# Altium PCB STM32F407VET6_4Layer_PCB.PcbDoc (part 1 of 3)
Units mm, origin at the board's own origin, x right, y up, seen from the top; angles counter-clockwise.
Board outline 86 x 80 mm, 4 copper layers (L1, L2, L3, L4), stack 0.999 mm thick; 172 components, 128 nets, 654 pads, 524 vias.
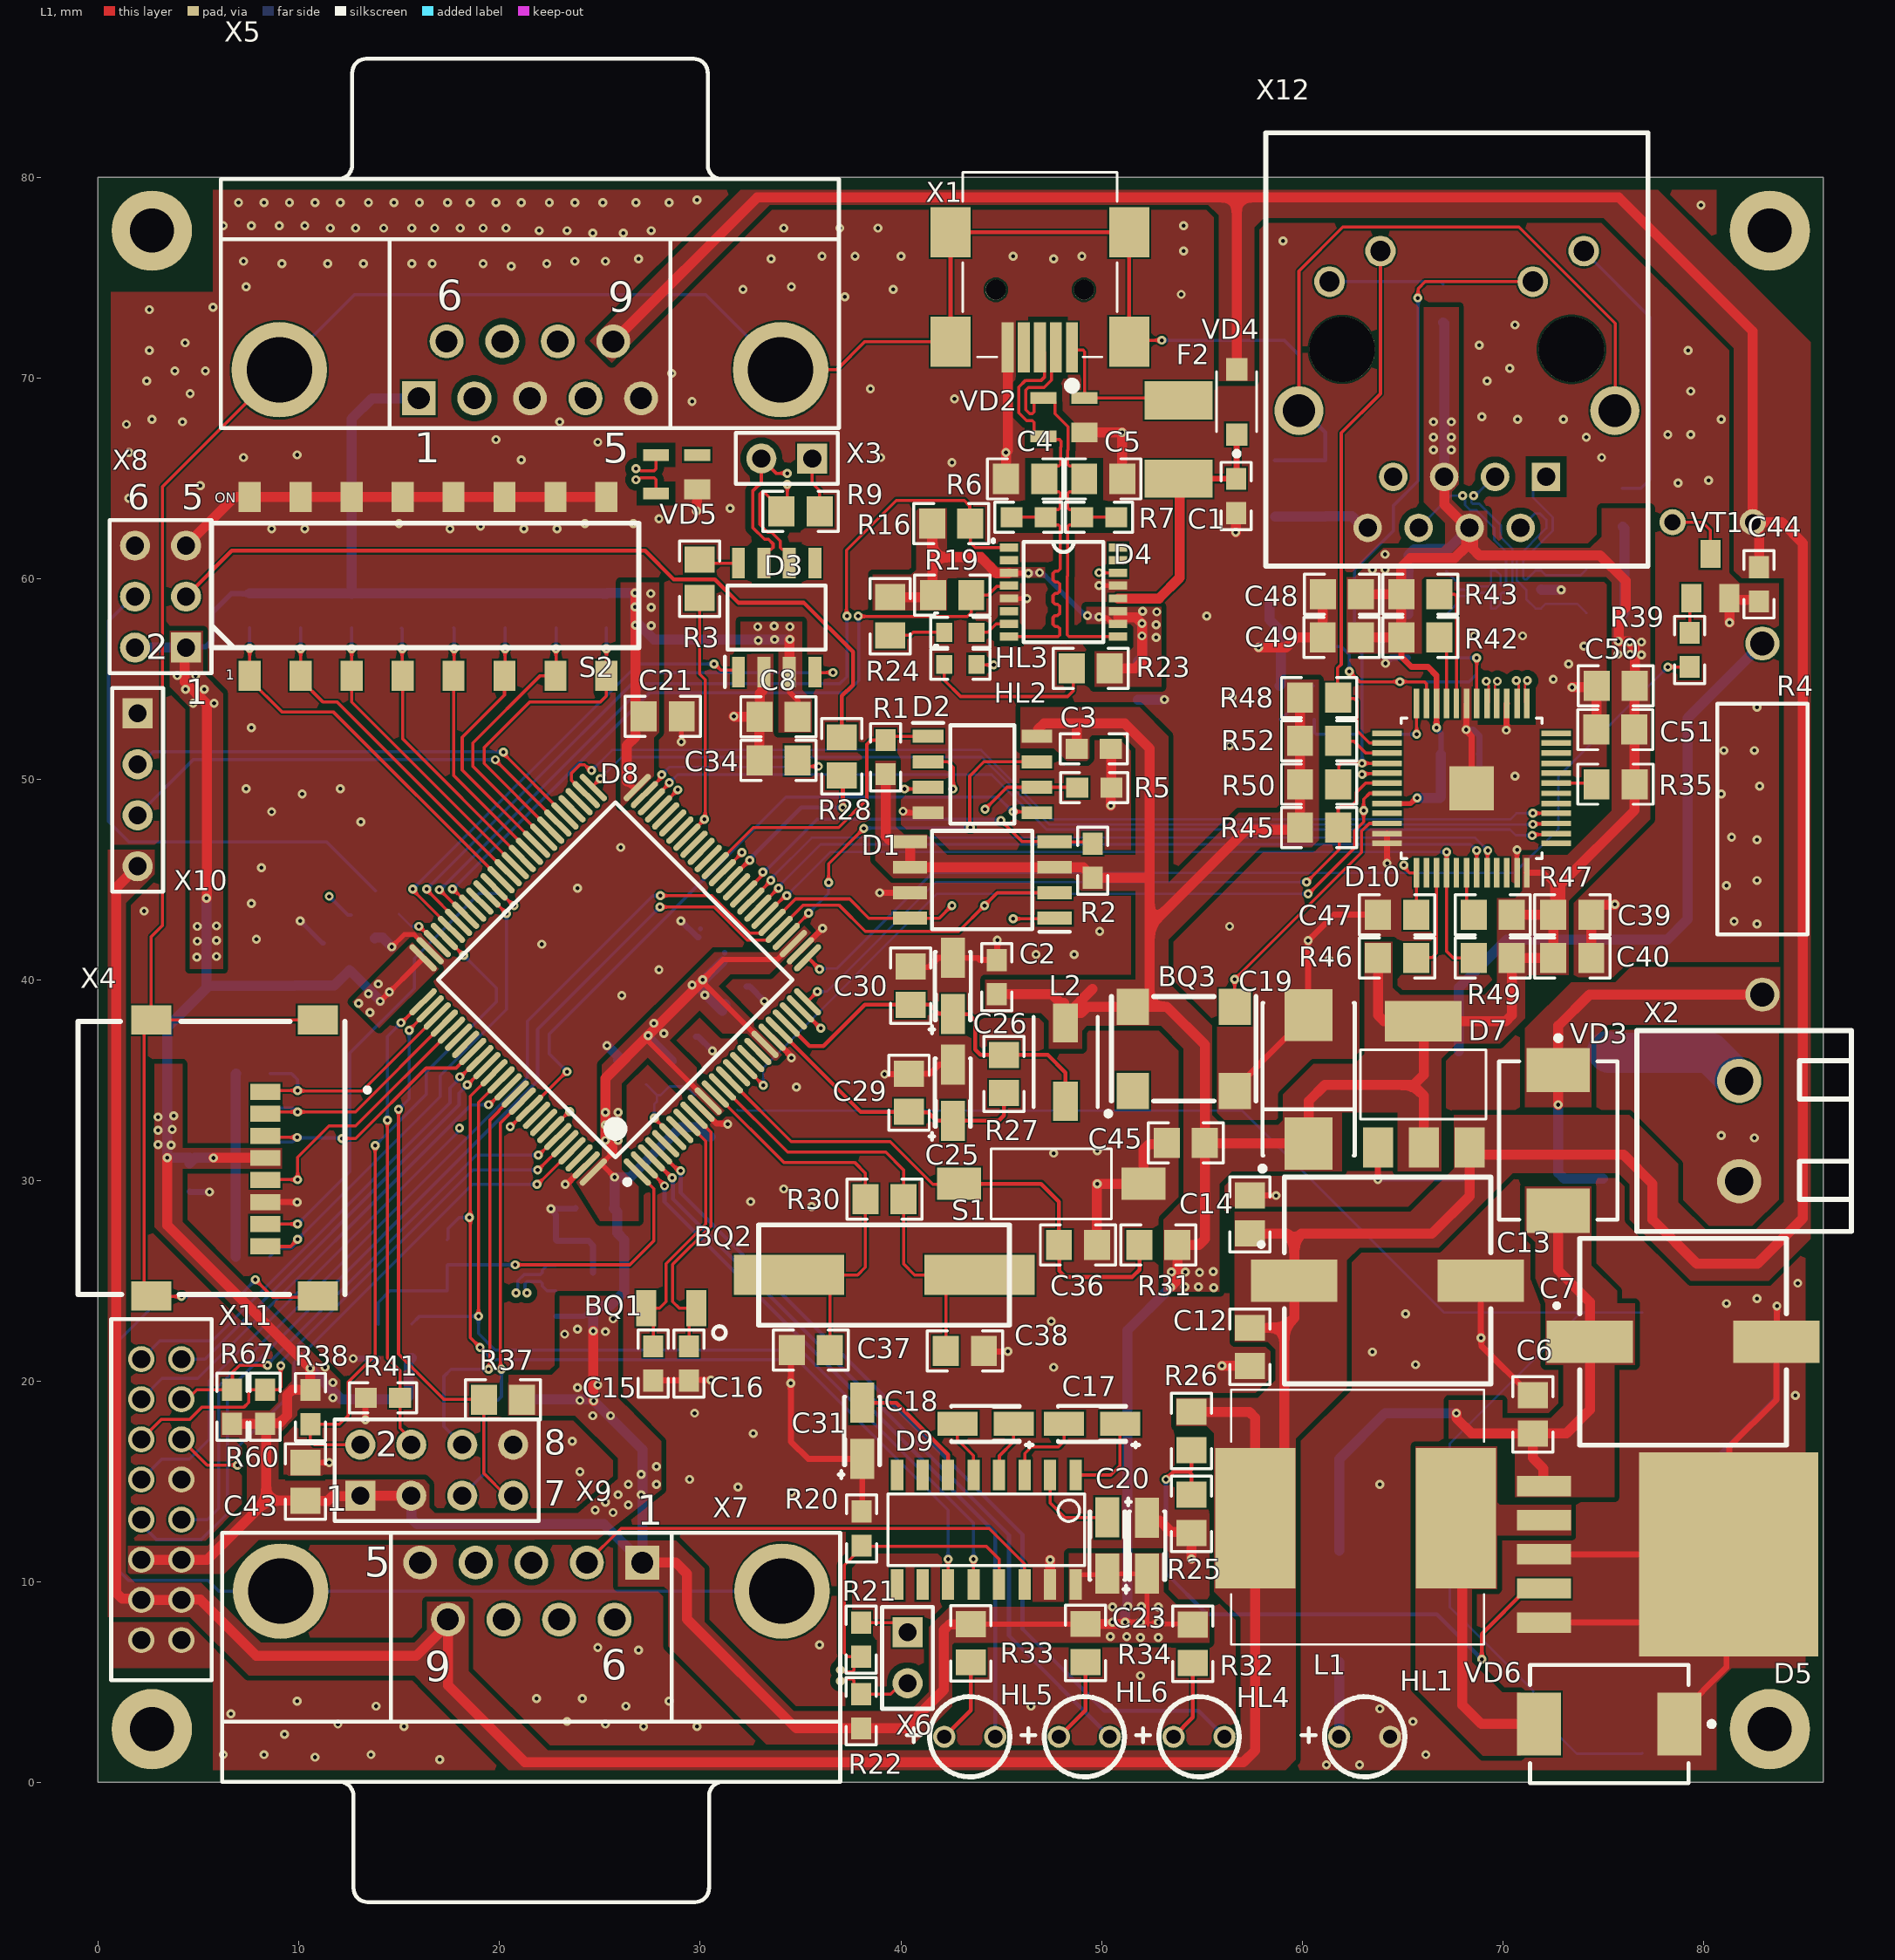
[diagram p0: L1 view]
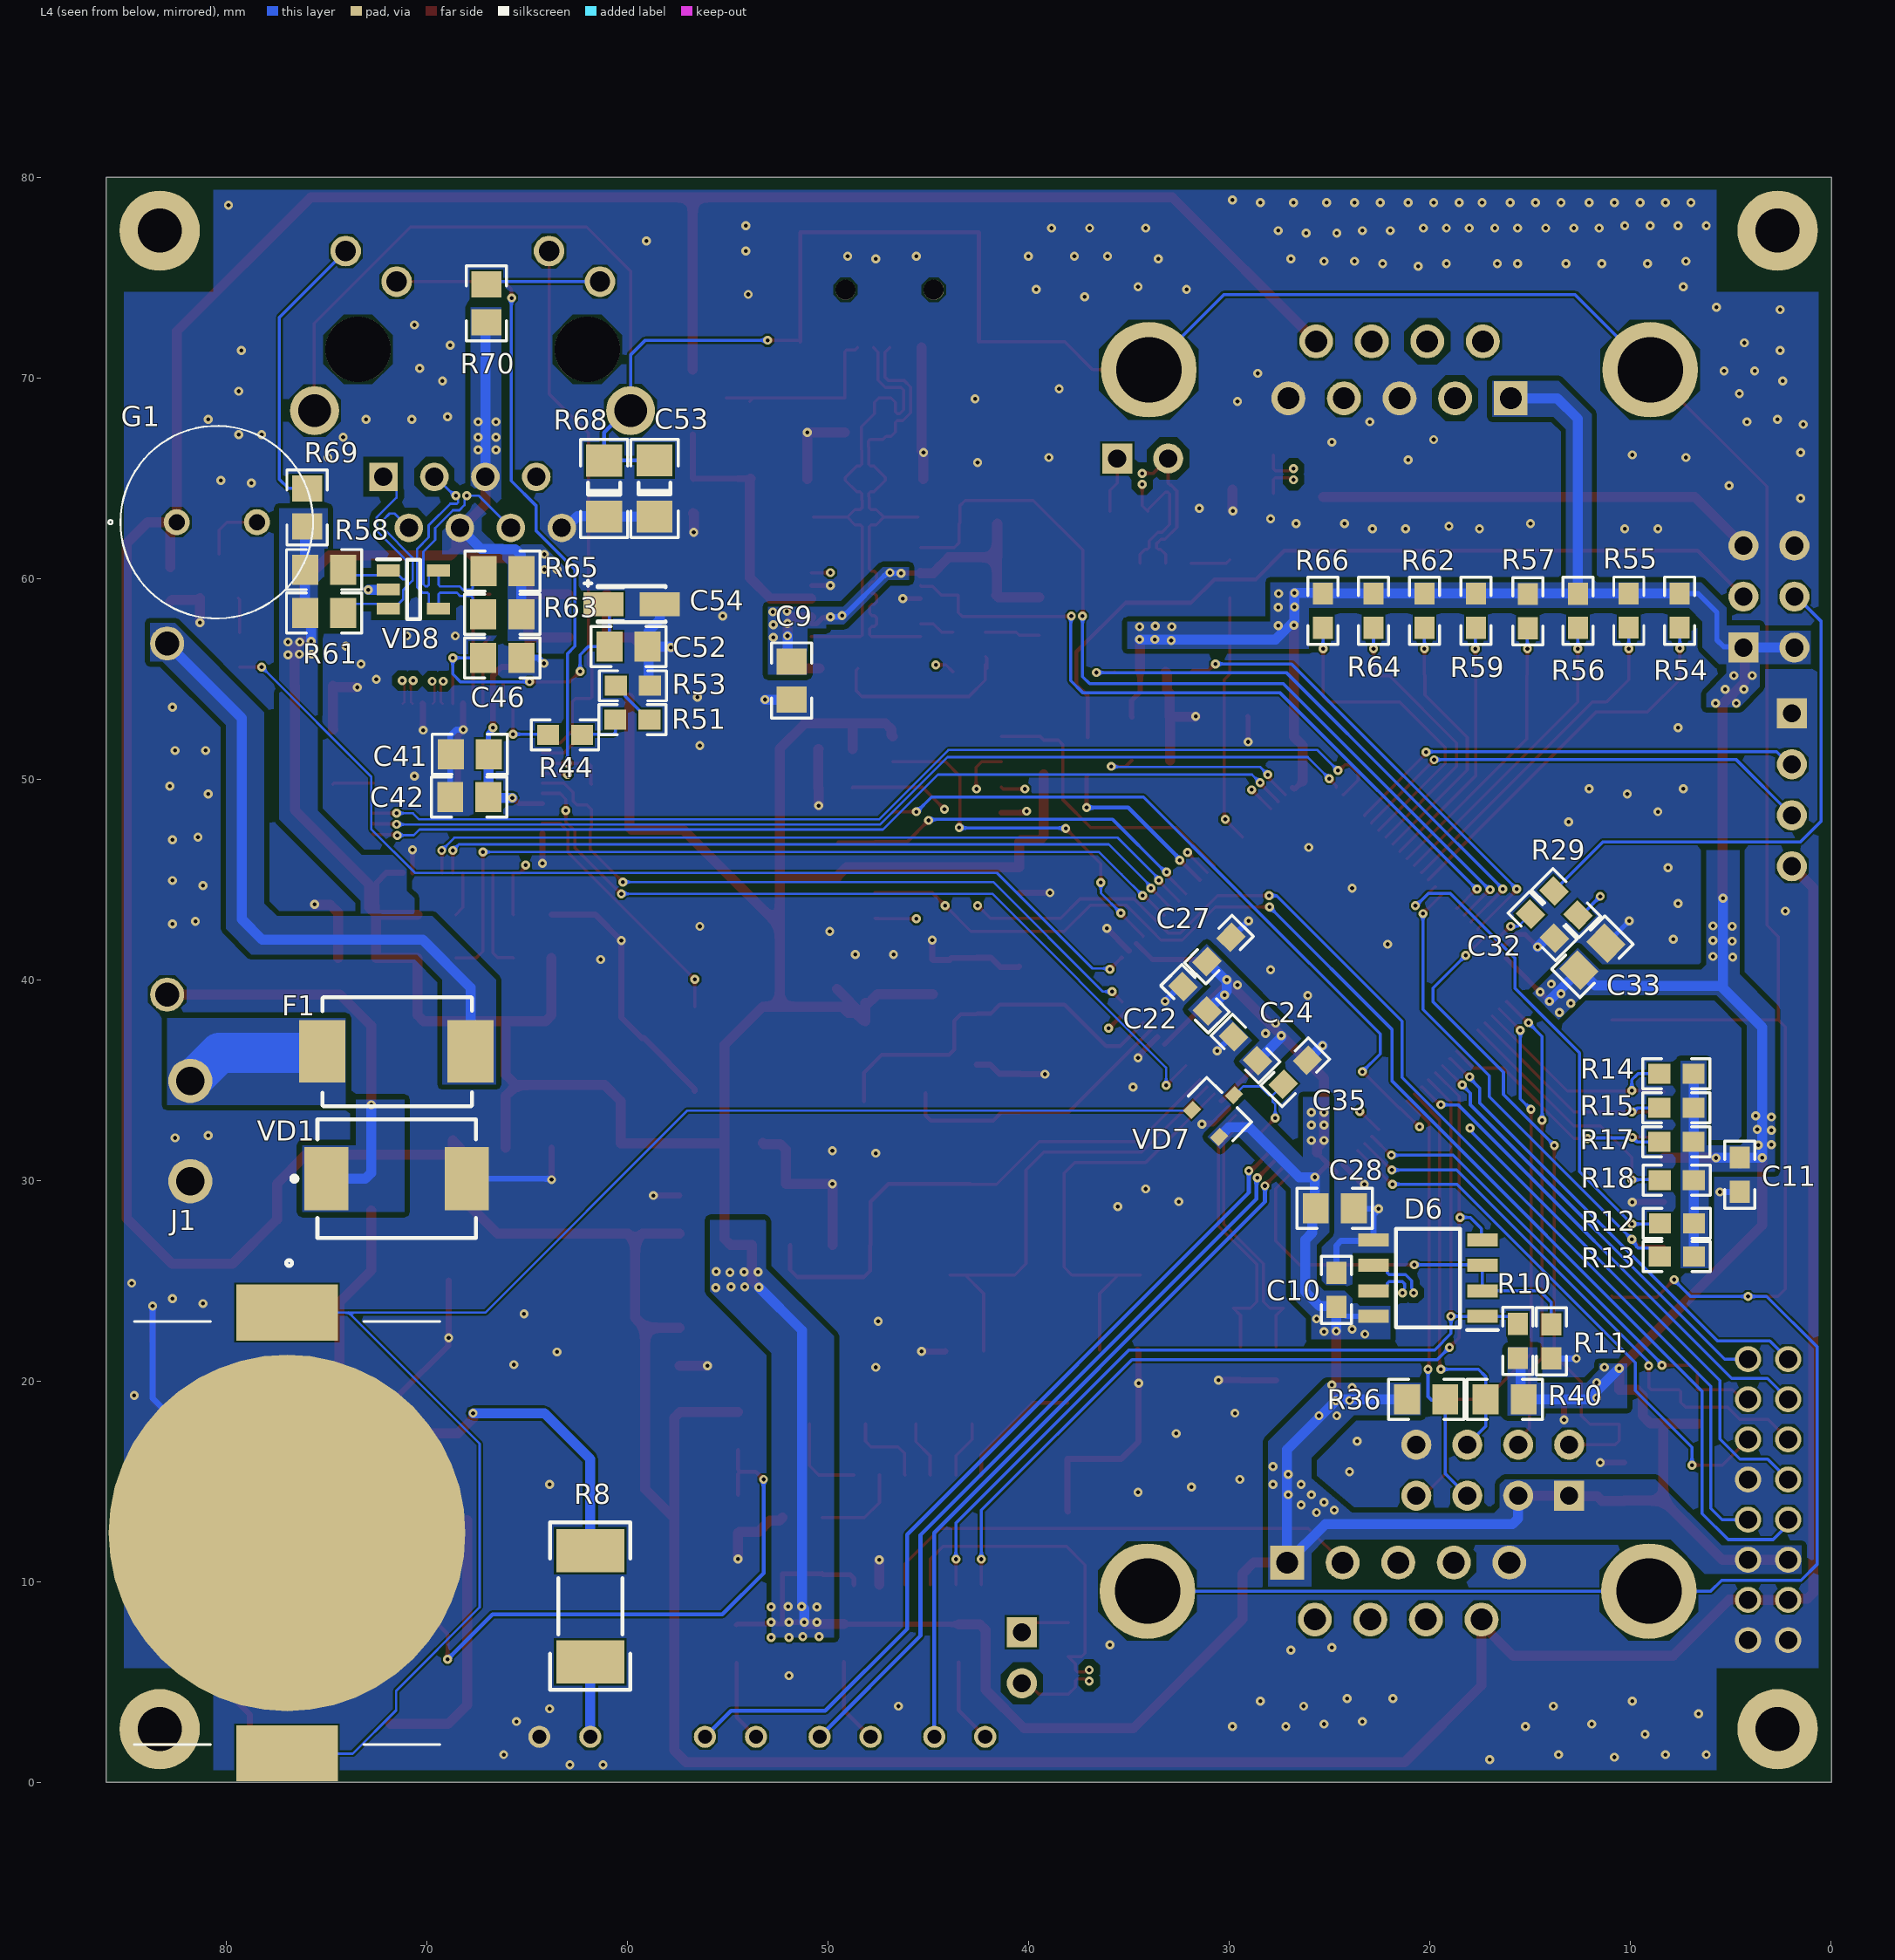
[diagram p1: L4 view, seen from below]
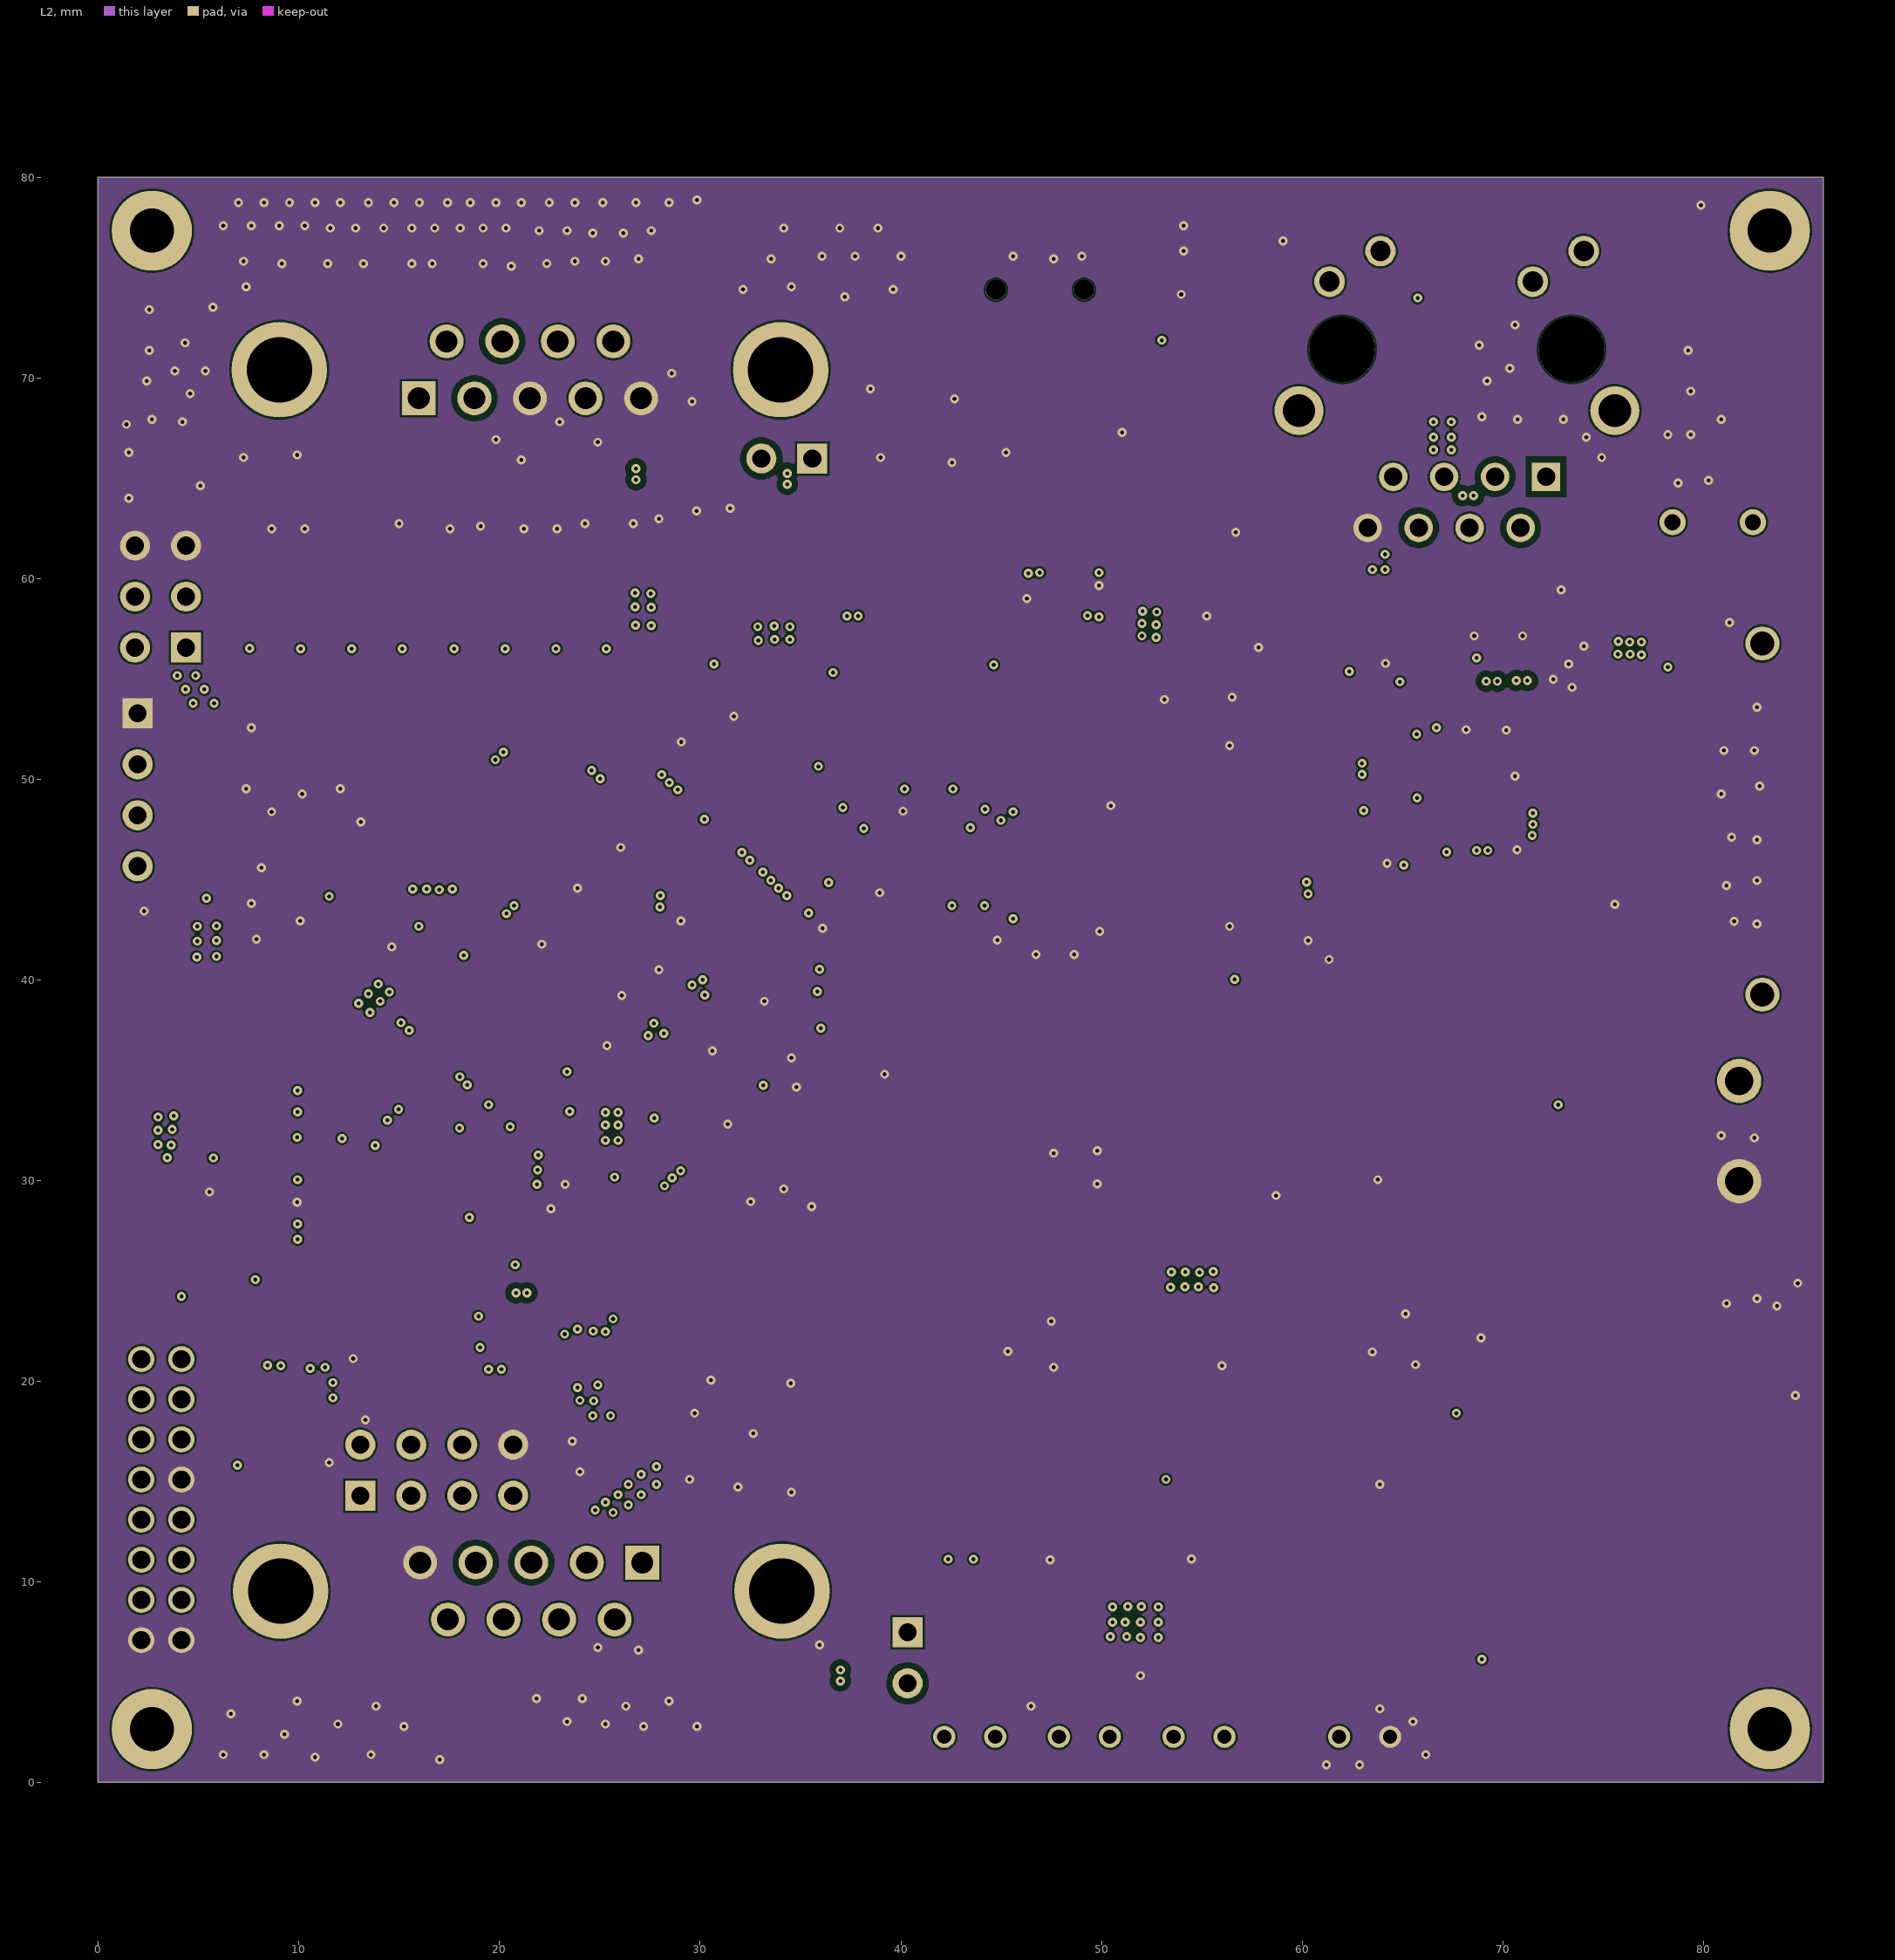
[diagram p2: L2]
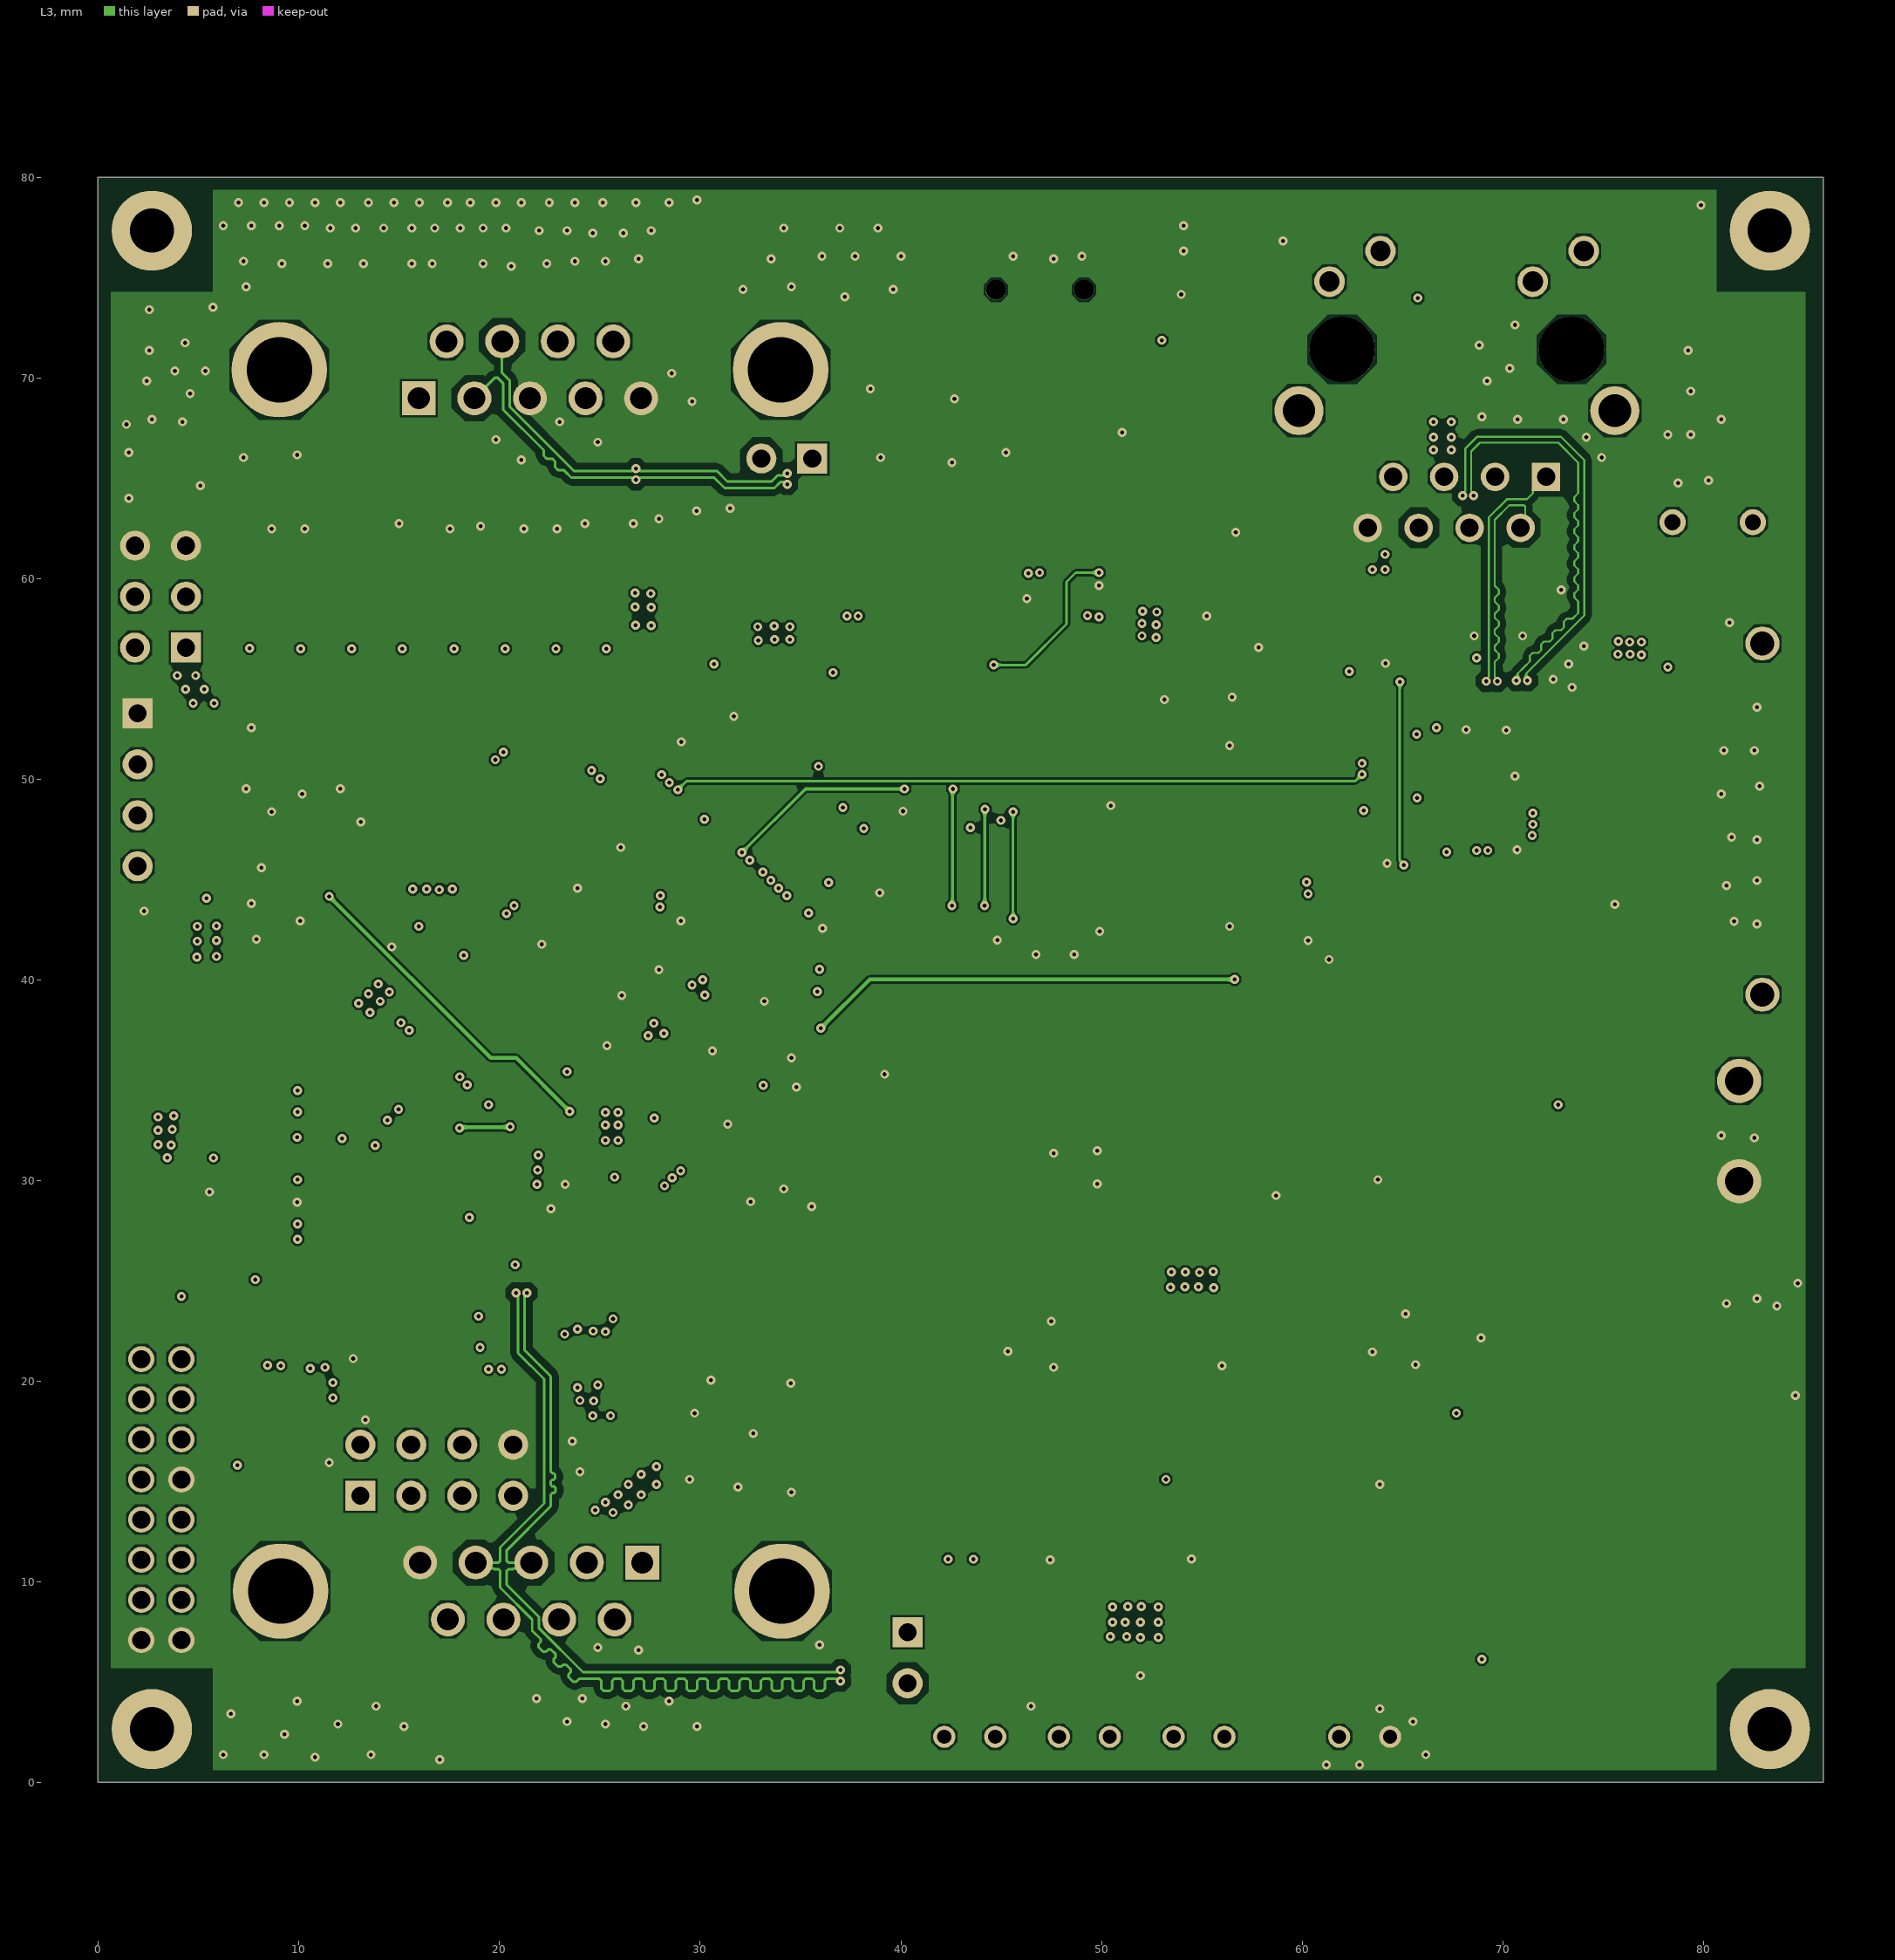
[diagram p3: L3]
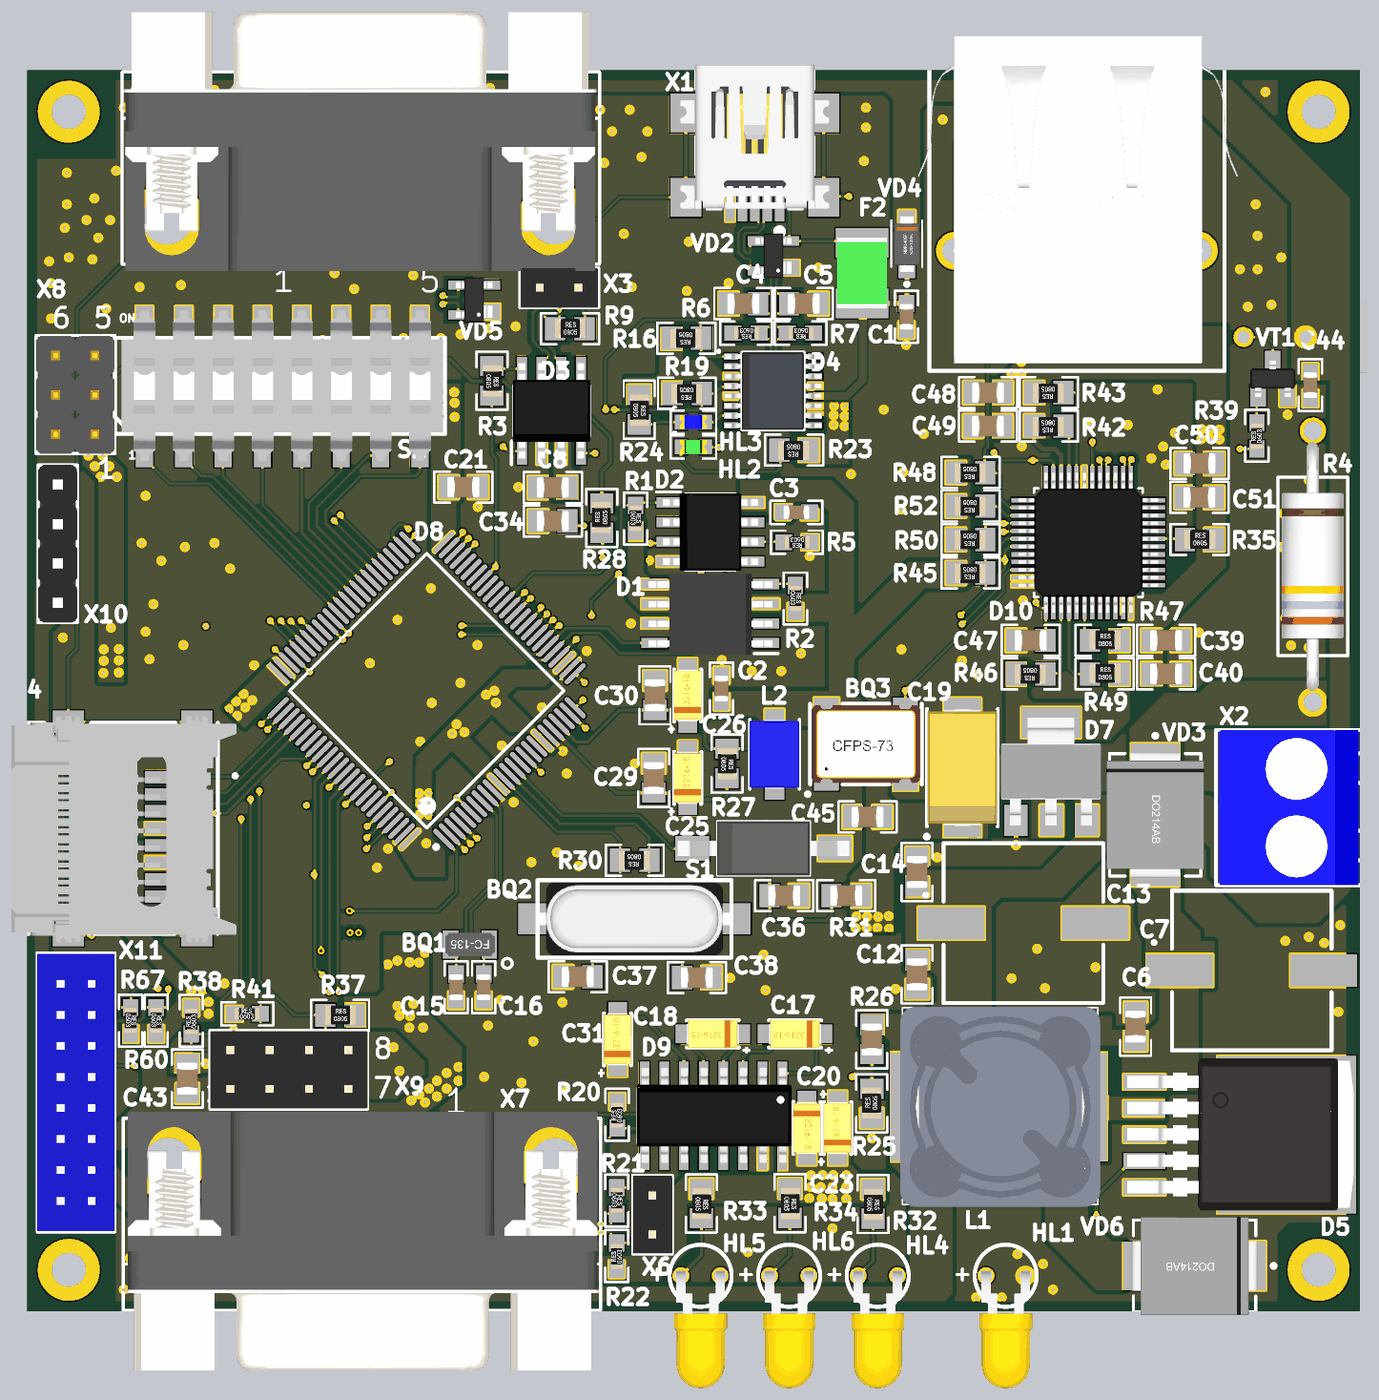
[diagram p6: 3D render of the assembled board from above, using the file's embedded part models]
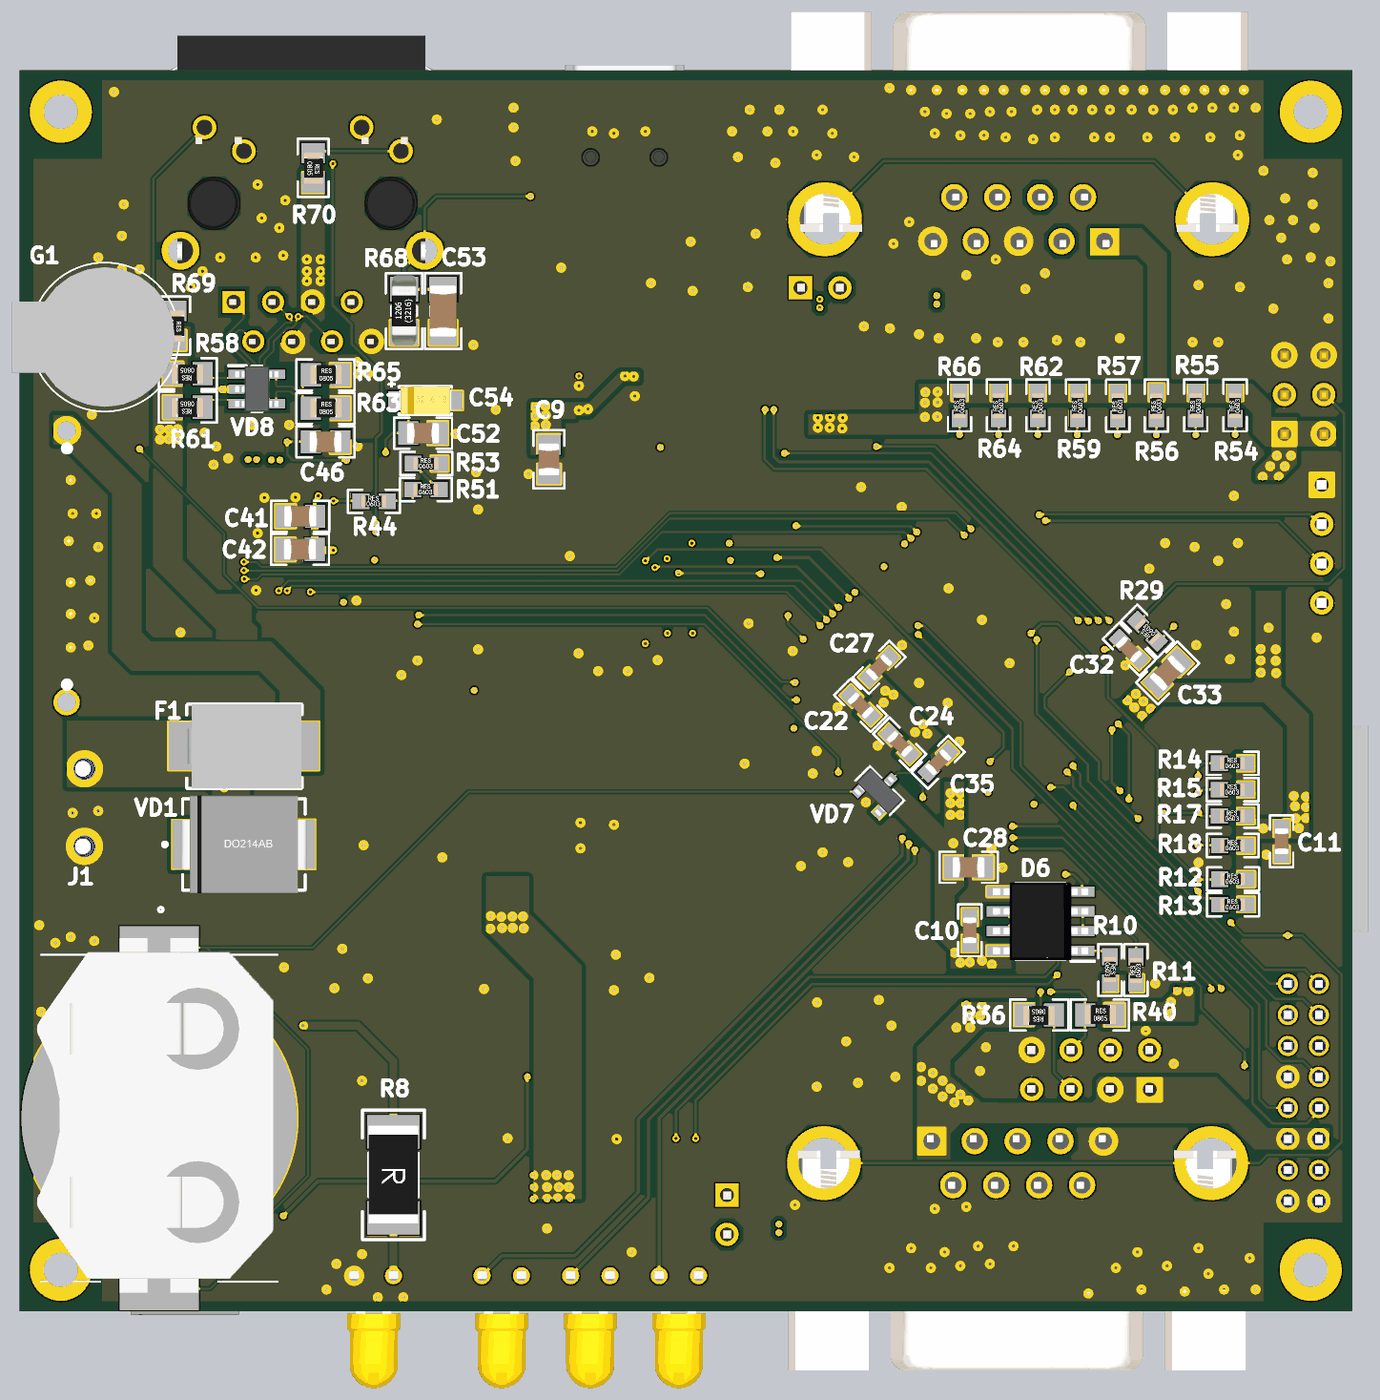
[diagram p7: 3D render of the assembled board from below, using the file's embedded part models]

## Layer stack, top to bottom
Top Solder: solder mask 0.03, SM-001, Dk 3.8
L1: signal copper 0.035
Dielectric 2: prepreg 0.0994, PP-017, Dk 4.1
L2: signal copper 0.0152
Dielectric 1: core 0.7, Core-039, Dk 4.6
L3: signal copper 0.0152
Dielectric 3: prepreg 0.0994, PP-017, Dk 4.1
L4: signal copper 0.035
Bottom Solder: solder mask 0.0254, SM-001, Dk 3.8

## Board outline
-0.021,0.01 -0.021,80.01 85.979,80.01 85.979,0.01

## Design rules (kind name [scope] priority, off if disabled: settings)
Clearance Clearance_DIFF100 [InDifferentialPairClass('DIFF100') vs InPolygon] p1: gap=0.3 ignorepadtopadclearanceinfootprint=FALSE
Clearance Clearance_DIFF90 [InDifferentialPairClass('DIFF90') vs InPolygon] p2: gap=0.3 ignorepadtopadclearanceinfootprint=FALSE
Clearance Clearance_DIFF [InDifferentialPairClass('DIFF') vs InPolygon] p3: gap=0.3 ignorepadtopadclearanceinfootprint=FALSE
Clearance Clearance_GND [InNet('GND') vs InPolygon] p4: gap=0.254 ignorepadtopadclearanceinfootprint=FALSE
Clearance [All] p5: gap=0.1 ignorepadtopadclearanceinfootprint=FALSE
DiffPairsRouting DiffPairsRouting_DIFF100 [InDifferentialPairClass('DIFF100')] p1: maxlimit=0.2 minlimit=0.2 mostfreqgap=0.2 toplayer_minwidth=0.119 toplayer_maxwidth=0.119 toplayer_prefwidth=0.119 midlayer1_minwidth=0.1 midlayer1_maxwidth=0.1 midlayer1_prefwidth=0.1 midlayer2_minwidth=0.1 midlayer2_maxwidth=0.1 midlayer2_prefwidth=0.1 bottomlayer_minwidth=0.119 bottomlayer_maxwidth=0.119 bottomlayer_prefwidth=0.119 maxuncoupledlength=12.7
DiffPairsRouting DiffPairsRouting_DIFF90 [InDifferentialPairClass('DIFF90')] p2: maxlimit=0.2 minlimit=0.2 mostfreqgap=0.2 toplayer_minwidth=0.153 toplayer_maxwidth=0.153 toplayer_prefwidth=0.153 midlayer1_minwidth=0.13 midlayer1_maxwidth=0.13 midlayer1_prefwidth=0.13 midlayer2_minwidth=0.13 midlayer2_maxwidth=0.13 midlayer2_prefwidth=0.13 bottomlayer_minwidth=0.119 bottomlayer_maxwidth=0.153 bottomlayer_prefwidth=0.153 maxuncoupledlength=12.7
DiffPairsRouting DiffPairsRouting_DIFF [InDifferentialPairClass('DIFF')] p3: maxlimit=0.2 minlimit=0.2 mostfreqgap=0.2 toplayer_minwidth=0.155 toplayer_maxwidth=0.155 toplayer_prefwidth=0.155 midlayer1_minwidth=0.13 midlayer1_maxwidth=0.13 midlayer1_prefwidth=0.13 midlayer2_minwidth=0.13 midlayer2_maxwidth=0.13 midlayer2_prefwidth=0.13 bottomlayer_minwidth=0.155 bottomlayer_maxwidth=0.155 bottomlayer_prefwidth=0.155 maxuncoupledlength=12.7
DiffPairsRouting [All] p4: maxlimit=0.254 minlimit=0.254 mostfreqgap=0.254 toplayer_minwidth=0.381 toplayer_maxwidth=0.381 toplayer_prefwidth=0.381 midlayer1_minwidth=0.381 midlayer1_maxwidth=0.381 midlayer1_prefwidth=0.381 midlayer2_minwidth=0.381 midlayer2_maxwidth=0.381 midlayer2_prefwidth=0.381 bottomlayer_minwidth=0.381 bottomlayer_maxwidth=0.381 bottomlayer_prefwidth=0.381 maxuncoupledlength=12.7
MatchedLengths MatchedLengths_DIFF100 [InDifferentialPairClass('DIFF100')] p1: tolerance=0.25 checknetsindiffpair=TRUE checkdiffpairvsdiffpair=FALSE checkxsignals=FALSE checkothers=FALSE
MatchedLengths MatchedLengths_DIFF90 [InDifferentialPairClass('DIFF90')] p2: tolerance=0.1 checknetsindiffpair=TRUE checkdiffpairvsdiffpair=FALSE checkxsignals=FALSE checkothers=FALSE
MatchedLengths MatchedLengths_DIFF [InDifferentialPairClass('DIFF')] p3: tolerance=0.1 checknetsindiffpair=TRUE checkdiffpairvsdiffpair=FALSE checkxsignals=FALSE checkothers=FALSE
PlaneClearance [All] p1: clearance=0.3
PolygonConnect [All] p1: connectstyle=Direct reliefconductorwidth=0.254 reliefentries=4 polygonreliefangle="90 Angle" airgapwidth=0.254
RoutingVias [All] p1: holewidth=0.2 width=0.45 viastyle="Through Hole" minholewidth=0.2 minwidth=0.45 maxholewidth=0.2 maxwidth=0.45
SolderMaskExpansion [All] p1: expansion=0.102 istentingtop=FALSE
Width Width_DIFF100 [InDifferentialPairClass('DIFF100')] p1: maxlimit=0.2 minlimit=0.1 preferedwidth=0.2 toplayer_minwidth=0.119 toplayer_maxwidth=0.119 toplayer_prefwidth=0.119 midlayer1_prefwidth=0.1 bottomlayer_minwidth=0.119 bottomlayer_maxwidth=0.16 bottomlayer_prefwidth=0.119 minimp=50.000000 maximp=50.000000 favimp=50.000000
Width Width_DIFF90 [InDifferentialPairClass('DIFF90')] p2: maxlimit=0.153 minlimit=0.13 preferedwidth=0.153 toplayer_minwidth=0.153 midlayer1_maxwidth=0.13 midlayer1_prefwidth=0.13 midlayer2_maxwidth=0.13 midlayer2_prefwidth=0.13 bottomlayer_minwidth=0.153 minimp=50.000000 maximp=50.000000 favimp=50.000000
Width Width_DIFF [InDifferentialPairClass('DIFF')] p3: maxlimit=0.155 minlimit=0.13 preferedwidth=0.155 toplayer_minwidth=0.155 midlayer1_maxwidth=0.13 midlayer1_prefwidth=0.13 midlayer2_maxwidth=0.13 midlayer2_prefwidth=0.13 bottomlayer_minwidth=0.155 minimp=50.000000 maximp=50.000000 favimp=50.000000
Width Width_POWER [InNet('3V3') OR InNet('5V') OR InNet('VCCIO')OR InNet('VCC')OR InNet('VBUS') OR InNet('NetF1_2') OR InNet('NetR4_2') OR InNet('NetC6_2') OR InNet('NetD5_2')] p4: maxlimit=2 minlimit=0.25 preferedwidth=0.5
Width Width_GROUND [InNet('GND')] p5: maxlimit=0.5 minlimit=0.23 preferedwidth=0.3
Width [All] p6: maxlimit=0.2 minlimit=0.119 preferedwidth=0.2 toplayer_minwidth=0.155 toplayer_prefwidth=0.155 midlayer1_minwidth=0.13 midlayer1_prefwidth=0.13 midlayer2_minwidth=0.13 bottomlayer_prefwidth=0.155 minimp=50.000000 maximp=50.000000 favimp=50.000000
28 further rules are at their usual default settings.

## Classes and differential pairs
differential pair class DIFF: CAN RS485
differential pair class DIFF90: USB
differential pair class DIFF100: RD TD
differential pair USB: +USB_P -USB_N
differential pair TD: +TD_P -TD_N
differential pair RS485: +RS485_P -RS485_N
differential pair RD: +RD_P -RD_N
differential pair CAN: +CAN_P -CAN_N

## Components (designator, comment, footprint, x,y, rotation, side; value= is the part's Value field where it differs from the comment)
BQ1 "FC-135_32.768KHZ-12.5" FC-135 28.55,23.647 r180 top
BQ2 "HC-49SM 8MHz" HC49SM 39.167,25.299 r180 top
BQ3 "CFPS-73" CFPS-73 54.102,36.568 r0 top
C1 "0603 10uF" C_SMD0603 56.718,64.123 r90 top
C2 "0603 100nF" C_SMD0603 44.78,40.146 r270 top
C3 "0603 100nF" C_SMD0603 49.62,51.511 r0 top
C4 "0805 47pF" C_SMD0805 46.192,64.973 r0 top
C5 "0805 47pF" C_SMD0805 50.089,64.973 r180 top
C6 "0805 0.1uF 50V" C_SMD0805 71.501,18.354 r270 top
C7 "220uF 50V" EEEFK1H221P 78.994,21.971 r0 top
C8 "0805 100nF" C_SMD0805 33.899,53.111 r0 top
C9 "0805 100nF" C_SMD0805 51.816,54.925 r90 bottom
C10 "0603 100nF" C_SMD0603 24.663,24.562 r90 bottom
C11 "0603 100nF" C_SMD0603 4.547,30.302 r270 bottom
C12 "0805 100nF" C_SMD0805 57.404,21.717 r90 top
C13 "220uF 25V" EEEFK1H221P 64.262,25.019 r0 top
C14 "0805 100nF" C_SMD0805 57.404,28.321 r270 top
C15 "0603 15pF" C_SMD0603 27.661,20.892 r270 top
C16 "0603 15pF" C_SMD0603 29.439,20.892 r270 top
C17 "TECAP_A 35V 0.1uF" TECAP_A 49.53,17.882 r180 top
C18 "TECAP_A 35V 0.1uF" TECAP_A 44.221,17.882 r180 top
C19 "TECAP_D 16V 100uF" TECAP_D 60.325,35.052 r90 top
C20 "TECAP_A 35V 0.1uF" TECAP_A 50.292,11.814 r270 top
C21 "0805 100nF" C_SMD0805 28.128,53.137 r180 top
C22 "0603 100nF" C_SMD0603 31.699,39.065 r225 bottom
C23 "TECAP_A 35V 0.1uF" TECAP_A 52.273,11.811 r90 top
C24 "0603 100nF" C_SMD0603 29.185,36.576 r225 bottom
C25 "TECAP_A 16V 1uF" TECAP_A 42.596,34.389 r90 top
C26 "TECAP_A 16V 1uF" TECAP_A 42.596,39.7 r90 top
C27 "0603 100nF" C_SMD0603 30.514,41.52 r315 bottom
C28 "0805 100nF" C_SMD0805 24.74,28.626 r0 bottom
C29 "0805 100nF" C_SMD0805 40.411,34.381 r270 top
C30 "0805 100nF" C_SMD0805 40.488,39.715 r90 top
C31 "TECAP_A 35V 0.1uF" TECAP_A 38.075,17.529 r90 top
C32 "0603 2.2uF" C_SMD0603 14.385,42.681 r45 bottom
C33 "0805 100nF" C_SMD0805 11.899,41.162 r315 bottom
C34 "0805 2.2uF" C_SMD0805 33.899,50.952 r0 top
C35 "0603 100nF" C_SMD0603 26.704,35.399 r315 bottom
C36 "0805 100nF" C_SMD0805 48.829,26.797 r0 top
C37 "0805 22pF" C_SMD0805 35.509,21.565 r0 top
C38 "0805 22pF" C_SMD0805 43.19,21.514 r0 top
C39 "0805 100nF" C_SMD0805 73.467,43.256 r0 top
C40 "0805 100nF" C_SMD0805 73.467,41.097 r0 top
C41 "0805 100nF" C_SMD0805 67.859,51.257 r0 bottom
C42 "0805 100nF" C_SMD0805 67.884,49.124 r0 bottom
C43 "0805 100nF" C_SMD0805 10.312,15.001 r270 top
C44 "0603 100nF" C_SMD0603 82.779,59.715 r90 top
C45 "0805 15pF" C_SMD0805 54.204,31.877 r0 top
C46 "0805 0.1uF" C_SMD0805 66.233,56.058 r180 bottom
C47 "0805 0.1uF" C_SMD0805 64.734,43.256 r180 top
C48 "0805 0.1uF" C_SMD0805 61.986,59.233 r0 top
C49 "0805 0.1uF" C_SMD0805 61.976,57.074 r0 top
C50 "0805 100nF" C_SMD0805 75.631,54.661 r180 top
C51 "0805 100nF" C_SMD0805 75.616,52.476 r180 top
C52 "0805 0.1uF" C_SMD0805 59.944,56.617 r180 bottom
C53 "1206 100pF 1000V" C_SMD1206 58.649,64.494 r90 bottom
C54 "TECAP_A 10V 10uF" TECAP_A 59.795,58.725 r180 bottom
D1 "AT45DB161E" SOIC8(5.3mm) 47.662,43.078 r180 top
D2 "M95256(2M)" "SOIC8 (SO-8)" 44.069,50.241 r0 top
D3 "SN65HVD230QDR" "SOIC8 (SO-8)" 33.807,58.064 r90 top
D4 "FT230XS-U" SSOP16 48.108,59.334 r0 top
D5 "LM2596S-5.0/NOPB" TO263-5 81.026,11.303 r270 top
D6 "ST3485" "SOIC8 (SO-8)" 20.091,25.146 r0 bottom
D7 "LM1117IMPX-3.3/NOPB" SOT223 66.04,34.798 r0 top
D8 "STM32F407VET6" STM-LQFP100_N 25.766,40.011 r135 top
D9 "ADM3202ARNZ" SOIC-16 44.196,12.827 r180 top
D10 "DP83848IVV (DP83848CVVNOPB)" QFP48 68.453,49.555 r180 top
F1 "MF-SM075/60" MF-SM075/60 75.218,36.449 r180 bottom
F2 "MF-MSMF050-2" FUSE1812x0 53.848,66.935 r270 top
G1 "HC0905A" HC090xA 80.467,62.814 r180 bottom
HL1 "GNL-3014BC-1" LED3mm 61.849,2.286 r0 top
HL2 "TO-1608BC-MYF" LED_SMD1608GREEN 42.964,55.728 r0 top
HL3 "TO-1608BC-MRE" LED_SMD1608 42.964,57.328 r0 top
HL4 "GNL-3014UYC" LED3mm 53.594,2.286 r0 top
HL5 "GNL-3014UGC" LED3mm 42.164,2.286 r0 top
HL6 "GNL-3014SRT (GNL-3014SRD)" LED3mm 47.879,2.286 r0 top
J1 "BK-912-TR" BK-912-TR 76.962,12.446 r270 bottom
L1 "SRR1208-680YL" SRR1208 62.666,13.183 r180 top
L2 "CM453232-101KL" INDPM4532 48.209,35.91 r270 top
R1 "0603 100k" R_SMD0603 39.243,51.105 r270 top
R2 "0603 100k" R_SMD0603 49.555,45.949 r270 top
R3 "0805 0 / (10k)" R_SMD0805 29.972,59.995 r270 top
R4 "KNP2WS-2.2 5%" KNP2WS 85.192,53.772 r270 top
R5 "0603 100k" R_SMD0603 49.643,49.581 r180 top
R6 "0603 27" R_SMD0603 46.367,63.068 r180 top
R7 "0603 27" R_SMD0603 49.886,63.068 r180 top
R8 "2512 1.5k 1%" R_SMD2512 61.849,8.795 r270 bottom
R9 "0805 120" R_SMD0805 35.001,63.348 r0 top
R10 "0603 10k" R_SMD0603 15.621,22.01 r270 bottom
R11 "0603 10k" R_SMD0603 13.945,21.996 r90 bottom
R12 "0603 10k" R_SMD0603 7.683,27.864 r180 bottom
R13 "0603 10k" R_SMD0603 7.684,26.213 r180 bottom
R14 "0603 10k" R_SMD0603 7.708,35.331 r180 bottom
R15 "0603 10k" R_SMD0603 7.708,33.63 r180 bottom
R16 "0805 10k" R_SMD0805 42.509,62.743 r180 top
R17 "0603 10k" R_SMD0603 7.71,31.928 r180 bottom
R18 "0603 10k" R_SMD0603 7.696,30.023 r180 bottom
R19 "0805 10k" R_SMD0805 42.56,59.182 r180 top
R20 "0603 560" R_SMD0603 38.049,12.663 r90 top
R21 "0603 120" R_SMD0603 38.024,7.126 r270 top
R22 "0603 560" R_SMD0603 38.024,3.556 r90 top
R23 "0805 200" R_SMD0805 49.464,55.524 r180 top
R24 "0805 200" R_SMD0805 39.472,58.125 r270 top
R25 "0805 (240 1%)" R_SMD0805 54.483,13.396 r90 top
R26 "0805 0 Ohm" C_SMD0805 54.483,17.526 r90 top
R27 "0805 47" R_SMD0805 45.136,35.316 r270 top
R28 "0805 10k" R_SMD0805 37.059,51.145 r90 top
R29 "0603 10k" R_SMD0603 13.208,43.84 r45 bottom
R30 "0805 1M" R_SMD0805 39.182,29.083 r180 top
R31 "0805 100k" C_SMD0805 52.832,26.797 r0 top
R32 "0805 130 1%" R_SMD0805 54.559,6.919 r270 top
R33 "0805 130 1%" R_SMD0805 43.485,6.944 r270 top
R34 "0805 130 1%" R_SMD0805 49.2,6.96 r270 top
R35 "0805 2k 1%" R_SMD0805 75.626,49.759 r0 top
R36 "0805 10k" R_SMD0805 20.183,19.101 r0 bottom
R37 "0805 10k" R_SMD0805 20.168,19.075 r0 top
R38 "0603 10k" R_SMD0603 10.566,18.72 r90 top
R39 "0603 1k" R_SMD0603 79.324,56.452 r90 top
R40 "0805 10k" R_SMD0805 16.271,19.101 r180 bottom
R41 "0603 10k" R_SMD0603 14.185,19.177 r0 top
R42 "0805 2k 1%" R_SMD0805 65.898,57.074 r180 top
R43 "0805 2k 1%" R_SMD0805 65.898,59.233 r180 top
R44 "0603 4.7k 1%" R_SMD0603 63.107,52.222 r180 bottom
R45 "0805 1.5k" R_SMD0805 60.848,47.6 r180 top
R46 "0805 2k 1%" R_SMD0805 64.734,41.097 r180 top
R47 "0805 2k 1%" R_SMD0805 69.505,43.256 r0 top
R48 "0805 2k 1%" R_SMD0805 60.848,54.077 r180 top
R49 "0805 2k 1%" R_SMD0805 69.505,41.097 r0 top
R50 "0805 2k 1%" R_SMD0805 60.848,49.759 r180 top
R51 "0603 150 1%" R_SMD0603 59.754,52.984 r180 bottom
R52 "0805 2k 1%" R_SMD0805 60.848,51.918 r180 top
R53 "0603 18 1%" R_SMD0603 59.729,54.661 r180 bottom
R54 "0603 10k" R_SMD0603 7.544,58.408 r90 bottom
R55 "0603 10k" R_SMD0603 10.084,58.408 r90 bottom
R56 "0603 10k" R_SMD0603 12.624,58.395 r90 bottom
R57 "0603 10k" R_SMD0603 15.113,58.383 r90 bottom
R58 "0805 51" R_SMD0805 75.118,60.452 r0 bottom
R59 "0603 10k" R_SMD0603 17.704,58.406 r90 bottom
R60 "0603 10k" R_SMD0603 8.306,18.733 r270 top
R61 "0805 51" R_SMD0805 75.118,58.293 r0 bottom
R62 "0603 10k" R_SMD0603 20.269,58.406 r90 bottom
R63 "0805 51" R_SMD0805 66.233,58.217 r180 bottom
R64 "0603 10k" R_SMD0603 22.809,58.406 r90 bottom
R65 "0805 51" R_SMD0805 66.228,60.376 r180 bottom
R66 "0603 10k" R_SMD0603 25.324,58.406 r90 bottom
R67 "0603 10k" R_SMD0603 6.655,18.733 r270 top
R68 "1206 1M" R_SMD1206 61.163,64.491 r90 bottom
R69 "0805 240" R_SMD0805 75.971,63.551 r270 bottom
R70 "0805 240" R_SMD0805 67.031,73.721 r270 bottom
S1 "1437566-3 (FSMSM)" 1437566-3 47.498,29.845 r0 top
S2 "DM-08-V" DM-08-V 7.544,55.169 r0 top
VD1 "SM15T39CA" "DO214AB SMC" 71.501,30.099 r180 bottom
VD2 "SP0503BAHTG" SP0503BAHTG 48.133,68.047 r180 top
VD3 "VS-30BQ040" "DO214AB SMC" 72.771,32.004 r270 top
VD4 "MBR130LSFT1G" SOD-123FL 56.744,68.828 r90 top
VD5 "SP0503BAHTG" SP0503BAHTG 28.82,65.207 r180 top
VD6 "SS34" "DO214AB SMC" 75.311,2.921 r180 top
VD7 "BAT54C" BAT54C_SOT23-3 30.473,33.563 r225 bottom
VD8 "SP0504BAHT" SOT23-5 70.663,59.461 r180 bottom
VT1 "MMBT3904.215" SOT23 80.35,60.13 r0 top
X1 "DS1104-B60SRS" MUSB-05-S-B-SM 46.929,71.517 r180 top
X2 "309-021-12" 390-021-12 81.788,34.972 r270 top
X3 "DS1021_1x2" PLD2 34.315,65.989 r180 top
X4 "microSD_500901-0801" 5009001-0801 -1.146,37.933 r270 top
X5 "DRB- 9FA (DS1037-9F)" "DRB- 9FA" 21.512,79.909 r0 top
X6 "DS1021_1x2" PLD2 40.335,6.223 r270 top
X7 "DRB- 9FA (DS1037-9F)" "DRB- 9FA" 21.578,0.048 r180 top
X8 "DS1021-2*3SF11-B" PLD2-3 3.099,59.106 r90 top
X9 "DS1021-2*4SF11-B" PLD2-4 16.866,15.57 r0 top
X10 "DS1021_1x4" PLD1X4 1.956,53.289 r270 top
X11 "B16B-PHDSS" PHD16 2.14,21.106 r270 top
X12 "TRJ0011TBNL (J0011D018)" J0011D018 67.716,71.425 r0 top

## Footprints (in the part's own frame and the unit in brackets; to place one, negate y for a bottom-side part, rotate by r counter-clockwise, add the part's x,y. Pads: shape width x height; smd on the part's side, far side on the other; paste and mask are expansions set on the pad)
390-021-12 [mm]
  round 2.2 hole 1.4: 1(0,0) 2(5,0)
  silkscreen extent -2.5,-5.1 7.5,5.6, body extent -2.5,-4.9 7.5,4.1, height 12.6
1437566-3 [mm]
  rect 2.18x1.6 smd: 1(-4.6,0) 2(4.6,0)
  silkscreen extent -3,-1.75 3,1.75, body extent -5.54,-1.75 5.54,1.75, height 4.87
5009001-0801 [mm]
  rect 0.8x1.5 smd: 1(3.5,9.477) 2(4.6,9.477) 3(5.7,9.477) 4(6.8,9.477) 5(7.9,9.477) 6(9,9.477) 7(10.1,9.477) 8(11.2,9.477)
  rect 1.45x2 smd: 9(-0.075,12.077) 10(13.675,12.077) 11(13.675,3.777) 12(-0.075,3.777)
  silkscreen extent 0,0.13 13.6,14.65, body extent -0.44,0.13 14.16,14.63, height 1.93
BAT54C_SOT23-3 [mm]
  rect 0.6x0.7 smd: 1(-0.95,-1) 2(0.95,-1) 3(0,1)
  silkscreen extent -1.57,-0.65 1.57,0.66, body extent -1.45,-1.17 1.45,1.13, height 1.1
BK-912-TR [mm] "CR2032battery holder"
  rect 2.79x5.08 smd: 1(-10.985,0) 2(10.985,0)
  round 17.78 smd: 3(0,0)
  silkscreen extent -13.59,-7.62 10.54,7.62, body extent -11.6,-7.89 11.25,7.34, height 4.47
C_SMD0603 [mm]
  rect 1.1x1 smd: 1(-0.85,0) 2(0.85,0)
  silkscreen extent -1.68,-0.75 1.68,0.75, body extent -0.85,-0.45 0.85,0.45, height 0.9
C_SMD0805 [mm]
  rect 1.3x1.5 smd: 1(-0.95,0) 2(0.95,0)
  silkscreen extent -1.87,-1 1.88,1, body extent -1.05,-0.67 1.05,0.68, height 0.75
C_SMD1206 [mm]
  rect 1.6x1.8 smd: 1(-1.4,0) 2(1.4,0)
  silkscreen extent -2.45,-1.17 2.45,1.17, body extent -1.67,-0.87 1.68,0.88, height 1
CFPS-73 [mm]
  rect 1.6x1.8 smd: 1(-2.54,-2.1) 2(2.54,-2.1) 3(2.54,2.1) 4(-2.54,2.1)
  silkscreen extent -3.87,-3.34 3.6,2.6, body extent -3.5,-2.51 3.5,2.51, height 1.52
DM-08-V [mm] "dipswitch8"
  rect 1.1x1.5 smd: 1(0,0) 2(2.54,0) 3(5.08,0) 4(7.62,0) 5(10.16,0) 6(12.7,0) 7(15.24,0) 8(17.78,0) 9(0,8.9) 10(2.54,8.9) 11(5.08,8.9) 12(7.62,8.9) 13(10.16,8.9) 14(12.7,8.9) 15(15.24,8.9) 16(17.78,8.9)
  silkscreen extent -1.9,1.4 19.4,7.6, body extent -1.48,-0.35 19.28,9.35, height 3.75
"DO214AB SMC" [mm]
  rect 2.2x3.15 smd: 1(-3.5,0) 2(3.5,0)
  silkscreen extent -5.23,-2.95 3.95,2.95, body extent -4.06,-3.15 4.06,3.15, height 2.62
"DRB- 9FA" [mm]
  rect 1.69x1.69 hole 1.09: 1(-5.54,-10.92)
  round 1.69 hole 1.09: 2(-2.77,-10.92) 3(0,-10.92) 4(2.77,-10.92) 5(5.54,-10.92) 6(-4.155,-8.08) 7(-1.385,-8.08) 8(1.385,-8.08) 9(4.155,-8.08)
  round 4.76 hole 3.26: 10(-12.495,-9.5) 11(12.495,-9.5)
  silkscreen extent -15.4,-12.4 15.4,6, body extent -15.3,-12.83 15.2,3.88, height 12.25
EEEFK1H221P [mm]
  rect 4.3x2.1 smd: 1(-4.65,0) 2(4.65,0)
  silkscreen extent -6.39,-5.15 5.15,5.15, body extent -5.85,-5.15 5.85,5.15, height 10.3
FC-135 [mm]
  rect 1x1.8 smd: 1(-1.25,0) 2(1.25,0)
  silkscreen extent -2.73,0.9 -2.09,1.54, body extent -1.6,-0.75 1.6,0.75, height 0.8
FUSE1812x0 [mm]
  rect 1.9x3.4 smd: 1(-1.95,0) 2(1.95,0)
  body extent -2.27,-1.62 2.28,1.62, height 0.85
HC49SM [mm]
  rect 5.5x2 smd: 1(-4.75,0) 2(4.75,0)
  silkscreen extent -6.25,-2.5 6.25,2.5, body extent -6.2,-2.35 6.2,2.35, height 3.8
HC090xA [mm]
  round 1.3 hole 0.8: 2(2,0) +(-2,0)
  silkscreen extent -5.4,-4.8 4.8,4.8, body extent -6,-4.5 4.5,4.5, height 4.3
INDPM4532 [mm]
  rect 1.95x1.25 smd: 1(-1.95,0) 2(1.95,0)
  silkscreen extent -2.25,-1.6 2.25,1.6, body extent -2.25,-1.6 2.25,1.6, height 3.4
J0011D018 [mil]
  rect 56x56 hole 36: 1(175,-250)
  round 56 hole 36: 2(125,-350) 3(75,-250) 4(25,-350) 5(-25,-250) 6(-75,-350) 7(-125,-250) 8(-175,-350)
  round 60 hole 40: 9(249,193) 10(149,133) 11(-150,193) 12(-250,133)
  round 128 hole 128 unplated: None(-225,0) None(225,0)
  round 96 hole 64: S1(-310,-120) S2(310,-120)
  silkscreen extent -375,-425 375,425, body extent -404,-406 409,425, height 633
KNP2WS [mm]
  round 1.7 hole 1.2: 1(-3,-2.25) 2(14.5,-2.25)
  silkscreen extent 0,-4.5 11.5,0, body extent -2.27,-4.27 13.77,-0.27, height 5
LED3mm [mm]
  round 1.1 hole 0.7: 1(0,0) 2(2.54,0)
  silkscreen extent -1.87,-2 3.27,2, body extent -0.42,-7.25 2.98,0.3, height 4.6
LED_SMD1608 [mm]
  rect 0.8x0.95 smd: 1(-0.8,0) 2(0.8,0)
  silkscreen extent -1.48,-0.75 1.48,0.96, body extent -0.85,-0.45 0.85,0.45, height 0.9
LED_SMD1608GREEN [mm]
  rect 0.8x0.95 smd: 1(-0.8,0) 2(0.8,0)
  silkscreen extent -1.48,-0.75 1.48,0.96, body extent -0.85,-0.45 0.85,0.45, height 0.9
MF-SM075/60 [mm]
  rect 2.3x3.1 smd: 1(0,0) 2(7.4,0)
  silkscreen extent 0.03,-2.75 7.48,2.7, body extent 0.07,-2.74 7.43,2.7, height 3.14
MUSB-05-S-B-SM [mm]
  rect 0.6x2.5 smd: 1(-1.6,0) 2(-0.8,0) 3(0,0) 4(0.8,0) 5(1.6,0)
  rect 2x2.5 smd: 6(-4.45,-0.3) 7(4.45,-0.3) 8(-4.45,-5.75) 9(4.45,-5.75)
  round 1 hole 1 unplated: None(-2.2,-2.88) None(2.2,-2.88)
  silkscreen extent -3.85,-8.73 3.85,2.1, body extent -4.8,-8.83 4.8,0.42, height 3.92
PHD16 [mm]
  round 1.3 hole 0.9: 1(0,0) 2(0,2) 3(2,0) 4(2,2) 5(4,0) 6(4,2) 7(6,0) 8(6,2) 9(8,0) 10(8,2) 11(10,0) 12(10,2) 13(12,0) 14(12,2) 15(14,0) 16(14,2)
  silkscreen extent -2,-1.5 16,3.5, body extent -1.95,-1.5 15.95,3.5, height 6.5
PLD1X4 [mm]
  rect 1.5x1.5 hole 0.9: 1(0,0)
  round 1.5 hole 0.9: 2(2.54,0) 3(5.08,0) 4(7.62,0)
  silkscreen extent -1.27,-1.27 8.89,1.27, body extent -1.28,-1.27 8.88,1.27, height 8.6
PLD2 [mm]
  rect 1.5x1.5 hole 0.9: 1(-1.27,0)
  round 1.5 hole 0.9: 2(1.27,0)
  silkscreen extent -2.54,-1.27 2.54,1.27, body extent -2.5,-1.26 2.5,1.28, height 8.5
PLD2-3 [mm]
  rect 1.5x1.5 hole 0.9: 1(-2.54,-1.27)
  round 1.5 hole 0.9: 2(-2.54,1.27) 3(0,-1.27) 4(0,1.27) 5(2.54,-1.27) 6(2.54,1.27)
  silkscreen extent -3.81,-2.54 3.81,2.54, body extent -3.84,-2.52 3.78,2.56, height 8.6
PLD2-4 [mm]
  rect 1.5x1.5 hole 0.9: 1(-3.81,-1.27)
  round 1.5 hole 0.9: 2(-3.81,1.27) 3(-1.27,-1.27) 4(-1.27,1.27) 5(1.27,-1.27) 6(1.27,1.27) 7(3.81,-1.27) 8(3.81,1.27)
  silkscreen extent -5.08,-2.54 5.08,2.54, body extent -5.07,-2.5 5.09,2.5, height 8.5
QFP48 [mil]
  rect 58x11 smd: 1(-166,108) 2(-166,89) 3(-166,69) 4(-166,49) 5(-166,30) 6(-166,10) 7(-166,-10) 8(-166,-30) 9(-166,-49) 10(-166,-69) 11(-166,-89) 12(-166,-108) 25(166,-108) 26(166,-89) 27(166,-69) 28(166,-49) 29(166,-30) 30(166,-10) 31(166,10) 32(166,30) 33(166,49) 34(166,69) 35(166,89) 36(166,108)
  rect 11x58 smd: 13(-108,-166) 14(-89,-166) 15(-69,-166) 16(-49,-166) 17(-30,-166) 18(-10,-166) 19(10,-166) 20(30,-166) 21(49,-166) 22(69,-166) 23(89,-166) 24(108,-166) 37(108,166) 38(89,166) 39(69,166) 40(49,166) 41(30,166) 42(10,166) 43(-10,166) 44(-30,166) 45(-49,166) 46(-69,166) 47(-89,166) 48(-108,166)
  rect 87x87 smd: 49(0,0)
  silkscreen extent -138,-138 138,138, body extent -177,-177 177,177, height 63
R_SMD0603 [mm]
  rect 1.1x1 smd: 1(-0.85,0) 2(0.85,0)
  silkscreen extent -1.68,-0.75 1.68,0.75, body extent -0.82,-0.4 0.78,0.4, height 0.45
R_SMD0805 [mm]
  rect 1.3x1.5 smd: 1(-0.95,0) 2(0.95,0)
  silkscreen extent -1.88,-1 1.88,1, body extent -0.97,-0.6 1.03,0.65, height 0.55
R_SMD1206 [mm]
  rect 1.6x1.8 smd: 1(-1.4,0) 2(1.4,0)
  silkscreen extent -2.45,-1.17 2.45,1.17, body extent -2.24,-0.8 2.29,0.8, height 1.25
R_SMD2512 [mm]
  rect 2.15x3.4 smd: 1(-2.775,0) 2(2.775,0)
  silkscreen extent -4.18,-2 4.18,2, body extent -3.41,-1.66 3.39,1.64, height 0.64
SOD-123FL [mm]
  rect 1.12x1.08 smd: A(-1.645,0) C(1.6,0)
  silkscreen extent -2.72,-1 1.5,1, body extent -1.82,-0.82 1.78,0.83, height 0.95
"SOIC8 (SO-8)" [mm]
  rect 1.525x0.65 smd: 1(-2.712,1.905) 2(-2.712,0.635) 3(-2.712,-0.635) 4(-2.712,-1.905) 5(2.712,-1.905) 6(2.712,-0.635) 7(2.712,0.635) 8(2.712,1.905)
  silkscreen extent -3.47,-2.45 1.6,2.58, body extent -3.08,-2.5 3.08,2.5, height 2
SOIC8(5.3mm) [mm]
  rect 1.7x0.65 smd: 1(0,0) 2(0,-1.27) 3(0,-2.54) 4(0,-3.81) 5(7.2,-3.81) 6(7.2,-2.54) 7(7.2,-1.27) 8(7.2,0)
  silkscreen extent -0.76,-4.36 6.1,0.67, body extent -0.4,-4.5 7.6,0.75, height 2.58
SOIC-16 [mil]
  rect 24x60 smd: 1(-177.52,-98.62) 2(-127.52,-98.62) 3(-77.52,-98.62) 4(-27.52,-98.62) 5(22.48,-98.62) 6(72.48,-98.62) 7(122.48,-98.62) 8(172.48,-98.62) 9(172.48,116.38) 10(122.48,116.38) 11(72.48,116.38) 12(22.48,116.38) 13(-27.52,116.38) 14(-77.52,116.38) 15(-127.52,116.38) 16(-177.52,116.38)
  silkscreen extent -196,-62 190,79, body extent -201,-112 193,128, height 59
SOT23 [mm]
  rect 1x1.4 smd: B(-0.95,-1.1) C(0,1.1) E(0.95,-1.1)
  body extent -1.46,-1.17 1.46,1.17, height 1
SOT23-5 [mm]
  rect 1.15x0.6 smd: 1(-1.25,0.95) 2(-1.25,0) 3(-1.25,-0.95) 4(1.25,-0.95) 5(1.25,0.95)
  silkscreen extent -1.83,-1.48 0.33,1.5, body extent -1.4,-1.47 1.4,1.47, height 1.45
SOT223 [mil]
  rect 59x79 smd: 1(-89,-124) 2(1,-124) 3(91,-124)
  rect 150x79 smd: 4(0,124)
  silkscreen extent -123,-68 123,68, body extent -128,-136 128,136, height 64
SP0503BAHTG [mm]
  rect 1.3x0.99 smd: 1(-1.025,0.76)
  rect 1.3x0.59 smd: 2(-1.025,-0.96) 3(1.025,-0.96) 4(1.025,0.96)
  body extent -1.18,-1.45 1.18,1.45, height 1.22
SRR1208 [mm]
  rect 4x7 smd: 1(-5,0) 2(5,0)
  silkscreen extent -6.4,-6.4 6.2,6.3, body extent -6.55,-6.45 6.35,6.45, height 8.5
SSOP16 [mil]
  rect 36x16 smd: 1(-107,87.5) 2(-107,62.5) 3(-107,37.5) 4(-107,12.5) 5(-107,-12.5) 6(-107,-37.5) 7(-107,-62.5) 8(-107,-87.5) 9(107,-87.5) 10(107,-62.5) 11(107,-37.5) 12(107,-12.5) 13(107,12.5) 14(107,37.5) 15(107,62.5) 16(107,87.5)
  silkscreen extent -138,-98 78,102, body extent -123,-98 123,98, height 69
STM-LQFP100_N [mm] "Thin QFP, 100-Leads, Body 14x14mm, Pitch 0.5mm, IPC Medium Density"
  oval 1.8x0.3 smd: 1(-7.55,6) 2(-7.55,5.5) 3(-7.55,5) 4(-7.55,4.5) 5(-7.55,4) 6(-7.55,3.5) 7(-7.55,3) 8(-7.55,2.5) 9(-7.55,2) 10(-7.55,1.5) 11(-7.55,1) 12(-7.55,0.5) 13(-7.55,0) 14(-7.55,-0.5) 15(-7.55,-1) 16(-7.55,-1.5) 17(-7.55,-2) 18(-7.55,-2.5) 19(-7.55,-3) 20(-7.55,-3.5) 21(-7.55,-4) 22(-7.55,-4.5) 23(-7.55,-5) 24(-7.55,-5.5) 25(-7.55,-6) 51(7.55,-6) 52(7.55,-5.5) 53(7.55,-5) 54(7.55,-4.5) 55(7.55,-4) 56(7.55,-3.5) 57(7.55,-3) 58(7.55,-2.5) 59(7.55,-2) 60(7.55,-1.5) 61(7.55,-1) 62(7.55,-0.5) 63(7.55,0) 64(7.55,0.5) 65(7.55,1) 66(7.55,1.5) 67(7.55,2) 68(7.55,2.5) 69(7.55,3) 70(7.55,3.5) 71(7.55,4) 72(7.55,4.5) 73(7.55,5) 74(7.55,5.5) 75(7.55,6)
  oval 0.3x1.8 smd: 26(-6,-7.55) 27(-5.5,-7.55) 28(-5,-7.55) 29(-4.5,-7.55) 30(-4,-7.55) 31(-3.5,-7.55) 32(-3,-7.55) 33(-2.5,-7.55) 34(-2,-7.55) 35(-1.5,-7.55) 36(-1,-7.55) 37(-0.5,-7.55) 38(0,-7.55) 39(0.5,-7.55) 40(1,-7.55) 41(1.5,-7.55) 42(2,-7.55) 43(2.5,-7.55) 44(3,-7.55) 45(3.5,-7.55) 46(4,-7.55) 47(4.5,-7.55) 48(5,-7.55) 49(5.5,-7.55) 50(6,-7.55) 76(6,7.55) 77(5.5,7.55) 78(5,7.55) 79(4.5,7.55) 80(4,7.55) 81(3.5,7.55) 82(3,7.55) 83(2.5,7.55) 84(2,7.55) 85(1.5,7.55) 86(1,7.55) 87(0.5,7.55) 88(0,7.55) 89(-0.5,7.55) 90(-1,7.55) 91(-1.5,7.55) 92(-2,7.55) 93(-2.5,7.55) 94(-3,7.55) 95(-3.5,7.55) 96(-4,7.55) 97(-4.5,7.55) 98(-5,7.55) 99(-5.5,7.55) 100(-6,7.55)
  silkscreen extent -7.67,-6.25 6.25,6.82, body extent -7,-7 7,7, height 1.6
TECAP_A [mm]
  rect 2x1.2 smd: 1(-1.4,0) 2(1.4,0)
  silkscreen extent -2.35,-0.9 1.7,1.17, body extent -1.7,-0.9 1.7,0.9, height 1.7
TECAP_D [mm]
  rect 2.6x2.4 smd: 1(-3.2,0) 2(3.2,0)
  silkscreen extent -4.57,-2.3 3.8,2.42, body extent -3.75,-2.25 3.75,2.25, height 3.1
TO263-5 [mil]
  rect 40x106 smd: 1(-137.03,-352.81) 2(-70.03,-352.81) 3(-3.03,-352.81) 4(63.97,-352.81) 5(130.97,-352.81)
  rect 400x352 smd: 6(-3.03,9.19)
  body extent -197,-396 189,179, height 166

## Part data
BQ1: library part FC135-32768-7, "Clock SMD Crystal"
BQ2: library part HC49SM, "HC49SM"
BQ3: library part SPXO018044CFPS-73, "IQD FREQUENCY PRODUCTS - SPXO018044-CFPS-73 - OSCILLATOR FREQUENCY, 50MHZ"
C1 C2 C3 C10 C11 C15 C16 C22 C24 C27 C32 C35 C44: library part C0603, "SMD Cap 0603"
C4 C5 C6 C8 C9 C12 C21 C28 C29 C30 C33 C34 C36 C37 C38 C39 C40 C41 C42 C43 C45 C46 C47 C48 C49 C50 C51 C52: library part C0805, "SMD Cap 0805", PackageDocument=Mar-2001, Code_IPC=2012[0805], Code_JEITA=0805, ComponentLink1Description="Manufacturer Link", ComponentLink1URL=http://www.kemet.com/, ComponentLink2Description=Datasheet, ComponentLink2URL=http://www.kemet.com/kemet/web/homepage/kechome.nsf/vapubfilesname/F3102TA.pdf/$file/F3102TA.pdf, DatasheetDocument=Mar-2001, LatestRevisionDate=19-Mar-2004, LatestRevisionNote="Silkscreen size reduced.", Note="Footprint corresponds to dimensions for bulk cassette packaging. This case size has tightened tolerances.", PackageReference=0805, Published=17-Jul-2002, Publisher="Altium Limited"
C7 C13: library part EEEFK1H221P, "Ecap 220uF 50V G case Panasonic Aluminium Electrolytic Capacitor 220F 50 V dc 10mm Surface Mount series FK SMD lifetime 2000h", Manufacturer_Name=Panasonic, RS Part Number=6294598, Allied Price/Stock=https://www.alliedelec.com/panasonic-eee-fk1h221p/70256552/, Allied_Number=70256552, Arrow Part Number=EEEFK1H221P, Arrow Price/Stock=https://www.arrow.com/en/products/eeefk1h221p/panasonic, Datasheet Link=https://industrial.panasonic.com/cdbs/www-data/pdf/RDE0000/ABA0000C1181.pdf, Manufacturer_Part_Number=EEEFK1H221P, RS Price/Stock=http://uk.rs-online.com/web/p/products/6294598
C14: library part C0805, "SMD Cap 0805"
C17 C18 C20 C23 C25 C26 C31 C54: library part TECAP_A, "Tantalum pol cap type A"
C19: library part TECAP_D, "Tantalum pol cap type D"
C53: library part C1206, "SMD Cap 1206", PackageDocument=Mar-2001, Code_IPC="3216 [1206]", Code_JEITA=1206, ComponentLink1Description="Manufacturer Link", ComponentLink1URL=http://www.kemet.com/, ComponentLink2Description=Datasheet, ComponentLink2URL=http://www.kemet.com/kemet/web/homepage/kechome.nsf/vapubfilesname/F3102TA.pdf/$file/F3102TA.pdf, DatasheetDocument=Mar-2001, LatestRevisionDate=19-Mar-2004, LatestRevisionNote="Silkscreen size reduced.", PackageReference=1206, Published=17-Jul-2002, Publisher="Altium Limited"
D1: "SPI FLASH 16Mbit(528 bytes x 4096 pages)"
D2: library part M95256(2M)-WMN6TP, "M95256-WMN6TP, Serial EEPROM Memory 256kbit, Serial-SPI, 60ns 2.5  5.5 V, 8-Pin SOIC"
D3: "3.3-V CAN Transceiver with Standby Mode 8-SOIC -40 to 125", Package="SOIC-8 Texas Instruments", Availability=Good, MF="Texas Instruments", MP=SN65HVD230QDR, Price="1.73 USD", SnapEDA_Link=https://www.snapeda.com/parts/SN65HVD230QDR/Texas%20Instruments/view-part/?ref=snap
D4: "FT230XS-U, USB Controller, 3MBd, USB 1.1, USB 2.0, 5 V, 16-Pin SSOP", Package="SSOP-16 FTDI,", Availability=Unavailable, MF=FTDI,, MP=FT230XS-U, Price=None, SnapEDA_Link=https://www.snapeda.com/parts/FT230XS-U/FTDI%2C%20Future%20Technology%20Devices%20International%20Ltd/view-part/?ref=snap
D5: library part LM2596S, "SIMPLE SWITCHER&#174; 4.5V to 40V, 3A Low Component Count Step-Down Regulator"
D6: "3.3 V low power transceiver for RS-485"
D7: library part LM1117-3.3, "Линейный регулятор с низким падением напряжения, 3.3В"
D8: "ARM Cortex-M4 32-bit MCU+FPU, 210 DMIPS, 512 kB Flash, 192 kB Internal RAM, 82 I/Os, 100-pin LQFP, -40 to 85 degC, Tray", I/Os (High Current)=82, Manufacturer=STMicroelectronics, Operating Frequency(F) (Processor speed) (MHz)=168, Supplier Part Number 1=497-12075-ND, Supply Voltage(Vcc) max (V)=3.6, Supply Voltage(Vcc) min (V)=1.8, ComponentLink1Description="Manufacturer URL", ComponentLink1URL=http://www.st.com/web/en/home.html, ComponentLink2Description=Datasheet, ComponentLink2URL=http://www.st.com/st-web-ui/static/active/en/resource/technical/document/datasheet/DM00037051.pdf, ComponentLink3Description="Package Specification", ComponentLink3URL=http://www.st.com/st-web-ui/static/active/en/resource/technical/document/data_brief/DM00071938.pdf, Core="ARM Cortex-M4", D/A Converter=2x12-bit, DatasheetVersion="Rev. 4", FLASH Size (Prog) (kB)=512, Internal RAM Size (kB)=192, Mounting Technology="Surface Mount", PackageDescription="100-Pin Low Profile Quad Flat Package, 14 x 14 mm Body, 0.5 mm Pitch", PackageReference=LQFP100, PackageVersion="Rev. 1, 06/2013", Packing=Tray, PartNumber=STM32F407VET6, Supplier 1=Digi-Key, Supplier 2=Farnell, Supplier 3=Newark, Supplier 4=Mouser, Supplier Part Number 2=2064367, Supplier Part Number 3=73T2332, Supplier Part Number 4=511-STM32F407VET6
D9: "3.3V SMD RS232-UART"
D10: library part DP83848CVVNOPB, "ETH Transciever"
F1: "Resettable Fuse PTC 0.75A(hold) 1.5A(trip) 60V 10A 1.7W 0.3s 0.23Ohm SMD Solder Pad 7.98 X 5.44 X 3."
F2: "PTC Resettable Fuse 0.5A_hold_ 1A_trip_ 15V 100A 0.8W 0.15s 0.15Ohm SMD Solder Pad 1812 T/R"
G1: "Buzzer 5V 80mA h=5mm d=9.5mm 3200Hz"
HL1: library part LED_0_25_4
HL2 HL3: library part LED_SMD, "TO-1608BC-BF \  TO-1608BC-MRE"
HL4: library part LED_0_25_4, "Светодиод желтый 25° d=3мм 1000мКд 589нМ (Yellow)"
HL5: library part LED_0_25_4, "Светодиод зеленый 25° d=3мм 1200мКд 572нМ (Green)"
HL6: library part LED_0_25_4, "Светодиод красный 20° d=3мм 200мКд 660нМ (Red)"
J1: "Holder Coin Cell 20mm Smd"
L1: library part SRR1208-682KL, "Fixed Inductors 330uH 10% SMD 1208", Manufacturer_Name=Bourns, Arrow Part Number=SRR1208-682KL, Arrow Price/Stock=https://www.arrow.com/en/products/srr1208-682kl/bourns, Datasheet Link=http://www.bourns.com/data/global/pdfs/SRR1208.pdf, Manufacturer_Part_Number=SRR1208-682KL
L2: library part CM453232-471KL, "BOURNS - CM453232-101KL - INDUCTOR, 4532 CASE, 100UH", Manufacturer_Name=Bourns, RS Part Number=6934353, Allied Price/Stock=https://www.alliedelec.com/bourns-cm453232-471kl/70154277/, Allied_Number=70154277, Arrow Part Number=CM453232-471KL, Arrow Price/Stock=https://www.arrow.com/en/products/cm453232-471kl/bourns, Datasheet Link=https://www.bourns.com/pdfs/cm.pdf, Geometry.Height=3.4mm, Manufacturer_Part_Number=CM453232-471KL, RS Price/Stock=http://uk.rs-online.com/web/p/products/6934353
R1 R2 R5 R6 R7 R10 R11 R12 R13 R14 R15 R17 R18 R20 R21 R22 R29 R38 R39 R41 R44 R51 R53 R54 R55 R56 R57 R59 R60 R62 R64 R66 R67: library part R0603, "SMD Res 0603"
R3 R9 R16 R19 R23 R24 R25 R26 R27 R28 R30 R31 R32 R33 R34 R35 R36 R37 R40 R42 R43 R45 R46 R47 R48 R49 R50 R52 R58 R61 R63 R65 R69 R70: library part R0805, "SMD Res 0805"
R4: library part KNP2WS, "Резисторы с проволочной обмоткой – сквозное отверстие 2.2ohm 2W 5%"
R8: library part R2512, "SMD Res 2512"
R68: library part R1206, "SMD Res 1206"
S1: library part 1437566-3, "FSMSM=3.5X6 SMT TACT", Contact_Current_Rating="50 mA", Package=None, Availability=Unavailable, Configuration_Pole-Throw="Single Pole - Single Throw", MF="TE Connectivity", MP=1437566-3, Price=None, SnapEDA_Link=https://www.snapeda.com/parts/1437566-3/TE%20Connectivity/view-part/?ref=snap
S2: "SMD DIPSWITCH8"
VD1: "TVS Diode Bi-Directional SM15T39CA 69.7V, 1500W, SMC 2-Pin"
VD2 VD5: "SP050xBA Series 8 V 30 pF Uni-Directional SMT TVS Avalanche Diode Array SOT-143", Package="SOT-143 Littelfuse", Availability=Unavailable, MF="Littelfuse Inc.", MP=SP0503BAHTG, Price=None, SnapEDA_Link=https://www.snapeda.com/parts/SP0503BAHTG/Littelfuse%20Inc./view-part/?ref=snap
VD3: "VS-30BQ040-M3/9AT Vishay VS-30BQ040-M3/9AT, SMT Schottky Diode, 40V 4A, 2-Pin DO-214AB"
VD4: "Schottky Barrier Diodes, 1A to 2A, ON Semiconductor"
VD6: "Rectifier, Schottky; DO-214AB; 3.0A IF; 0.75V; 40V; 100A IFRM; 10000V/us; 1000pF"
VD7: "Small Signal Schottky Diode, Dual Common Cathode, 30 V, 200 mA, 400 mV, 600 mA, 125 C"
VD8: "TVS Diode-4"
VT1: "Транзистор NPN 40В 0.2А [SOT-23-3]"
X1: library part "MSUB-05 (DS1104)", "Conn Mini USB 2.0 Type B RCP 5 POS 0.8mm Solder RA SMD 5 Terminal 1 Port Tray"
X2: "DG390-5.0-02P (XY118-2P-05) Зажимной Клеммник 2-контактный, 5.0мм угловой"
X3 X6: "Вилка штыревая 2.54мм 1x2 прямая тип1"
X4: "TransFlash Memory Card,1.1mm hinge type TransFlash Memory Card,1.1mm hinge type"
X8: library part DS1021_2x3, "Вилка штыревая 2.54мм 2x3 прямая тип1"
X9: library part DS1021_2x4, "Вилка штыревая 2.54мм 2x4 прямая тип1"
X10: "Вилка штыревая 2.54мм 1x4 прямая тип1"
X11: "HEADER, PHD, TOP, 16WAY, 2MM; Pitch Spacing:2mm; No. of Contacts:16Contacts;"
X12: library part "RJ45 J0011D018", "Conn RJ-45 F 8 POS 2.54mm Solder RA Thru-Hole 12 Terminal 1 Port Cat 5/Cat 6"

## Free pads (board coordinates)
  round 4 hole 2.2: 2(2.667,77.343) 2(83.312,77.343) 3(83.312,2.667) 4(2.667,2.667)

## Via types
v1: diameter 0.45, hole 0.2, L1 to L4, 524 vias